# Altium PCB PCB_ALU.PcbDoc (part 1 of 2)
Units mil, origin at the board's own origin, x right, y up, seen from the top; angles counter-clockwise.
Board outline 7085 x 7085 mil, 4 copper layers (Top Layer, VCC, GND, Bottom Layer), stack 23.756 mil thick; 181 components, 134 nets, 644 pads, 294 vias.
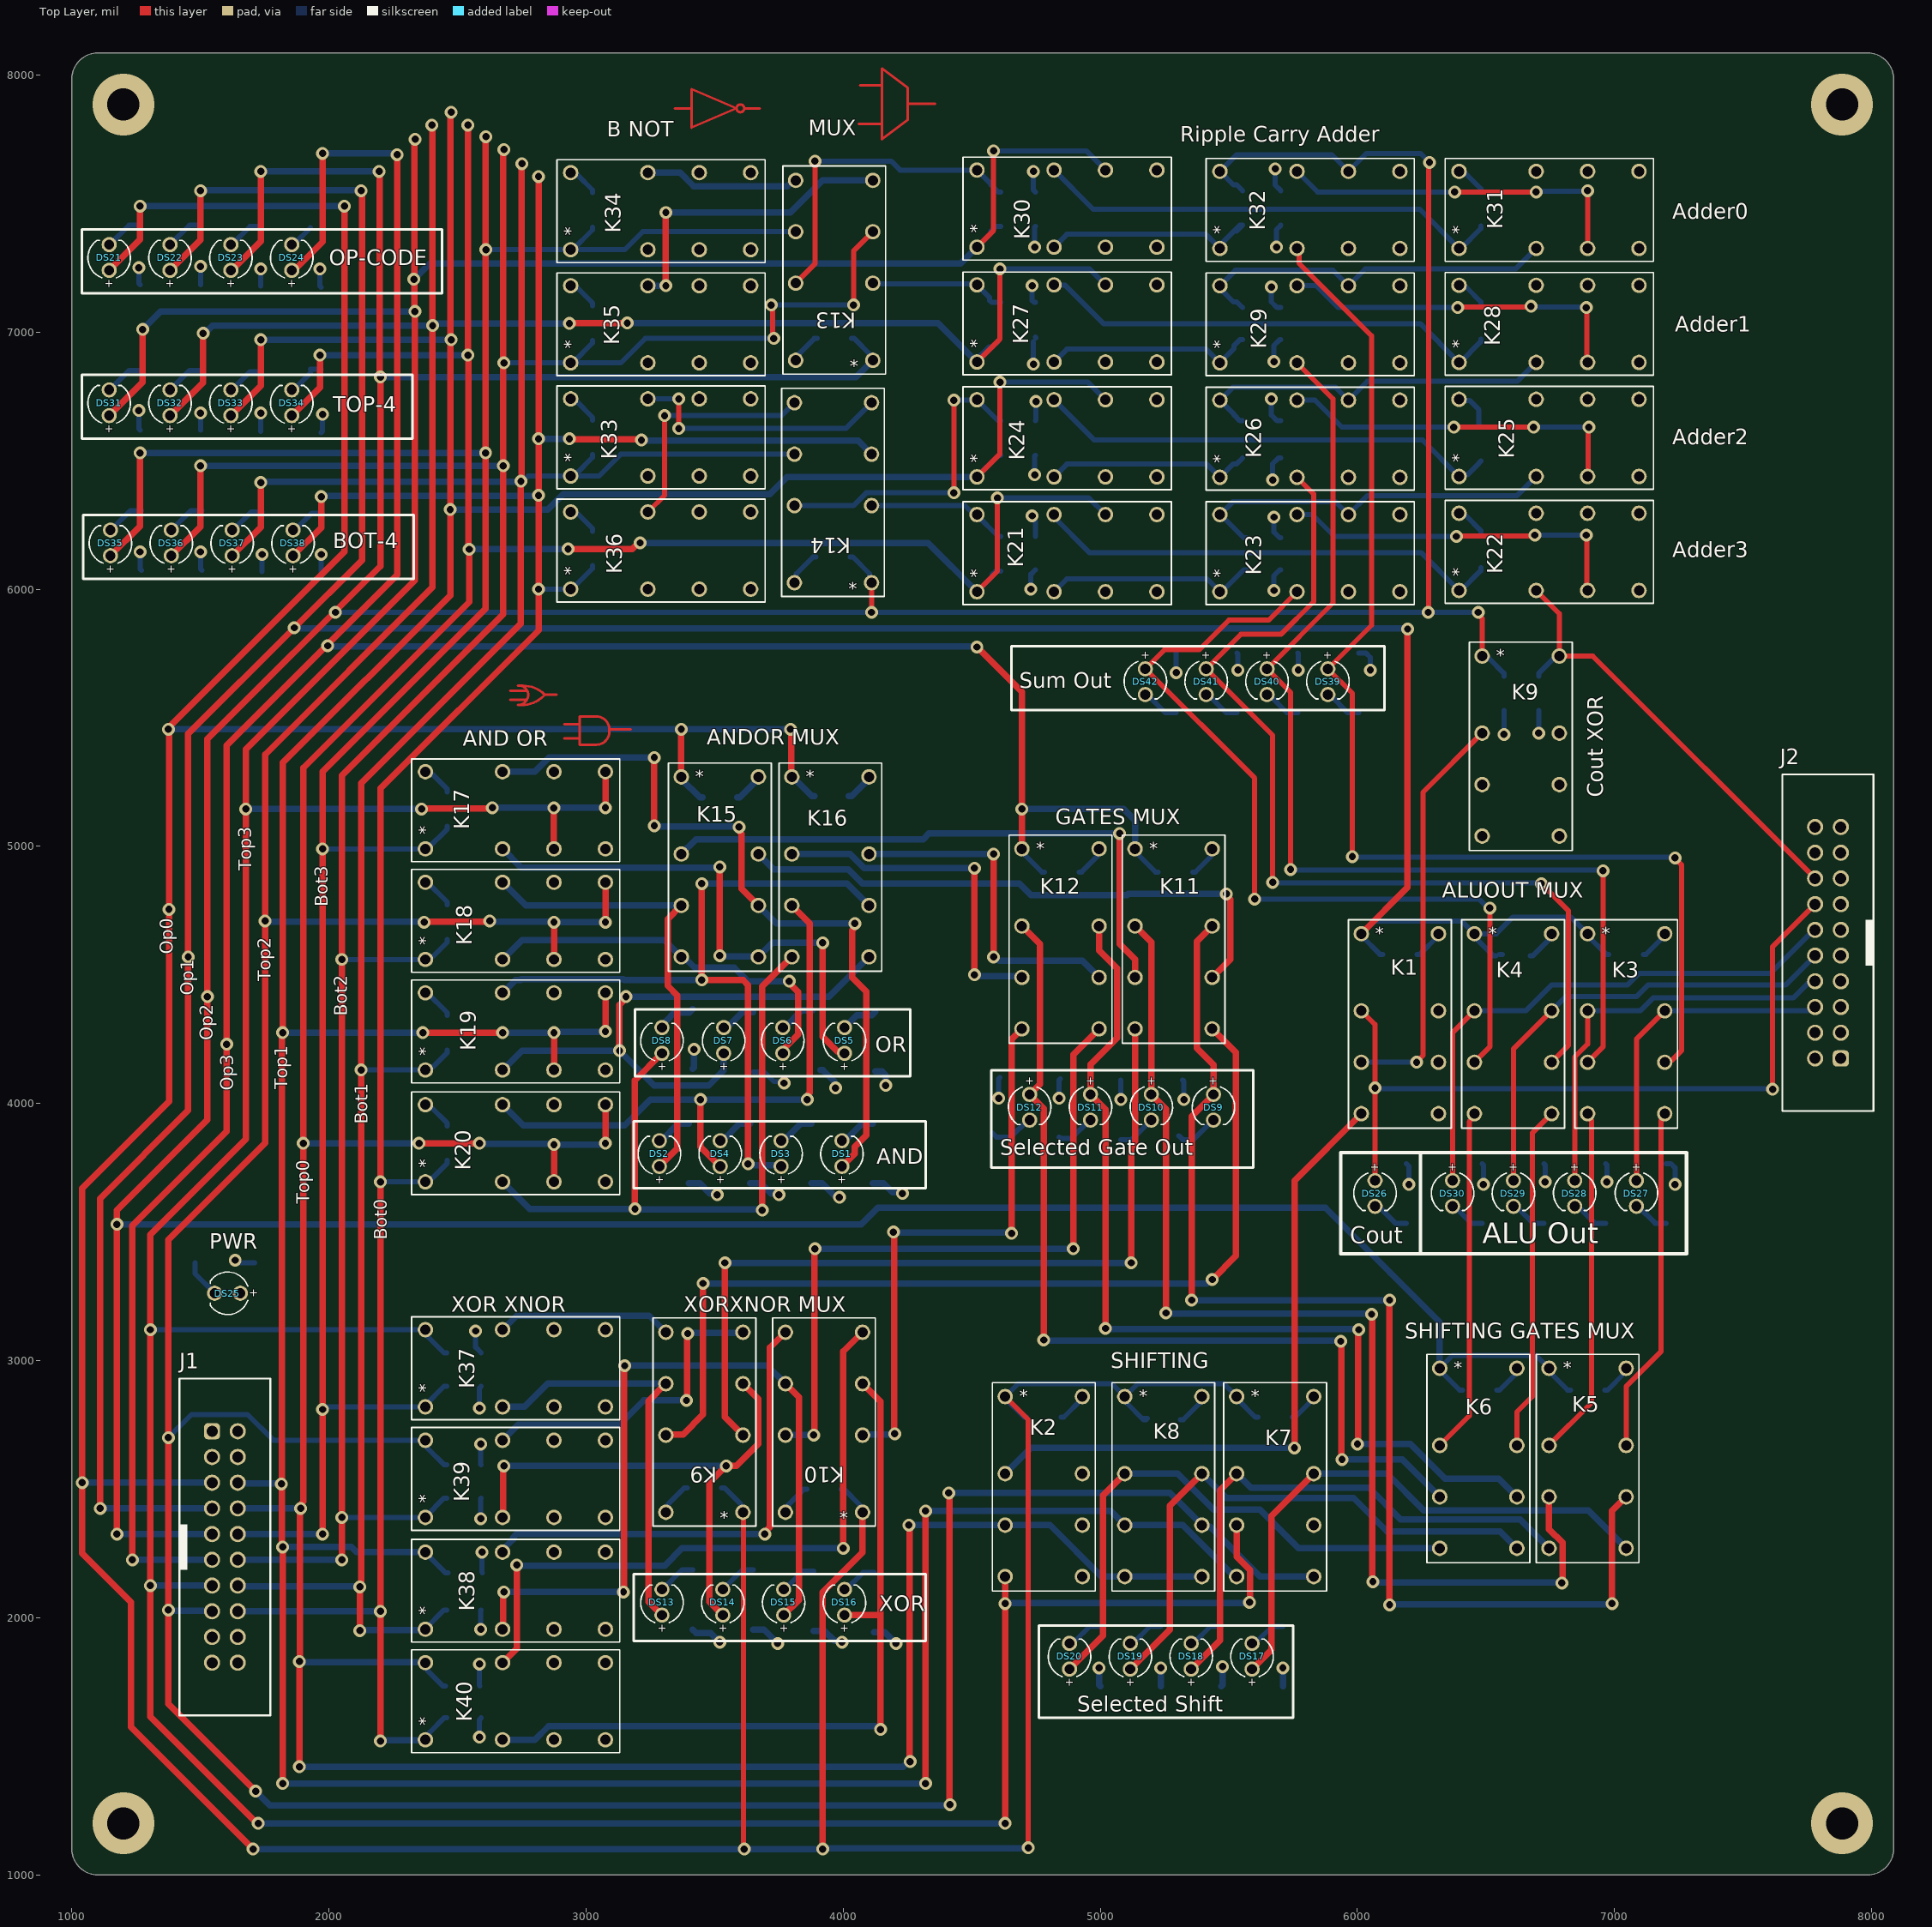
[diagram p0: Top Layer view]
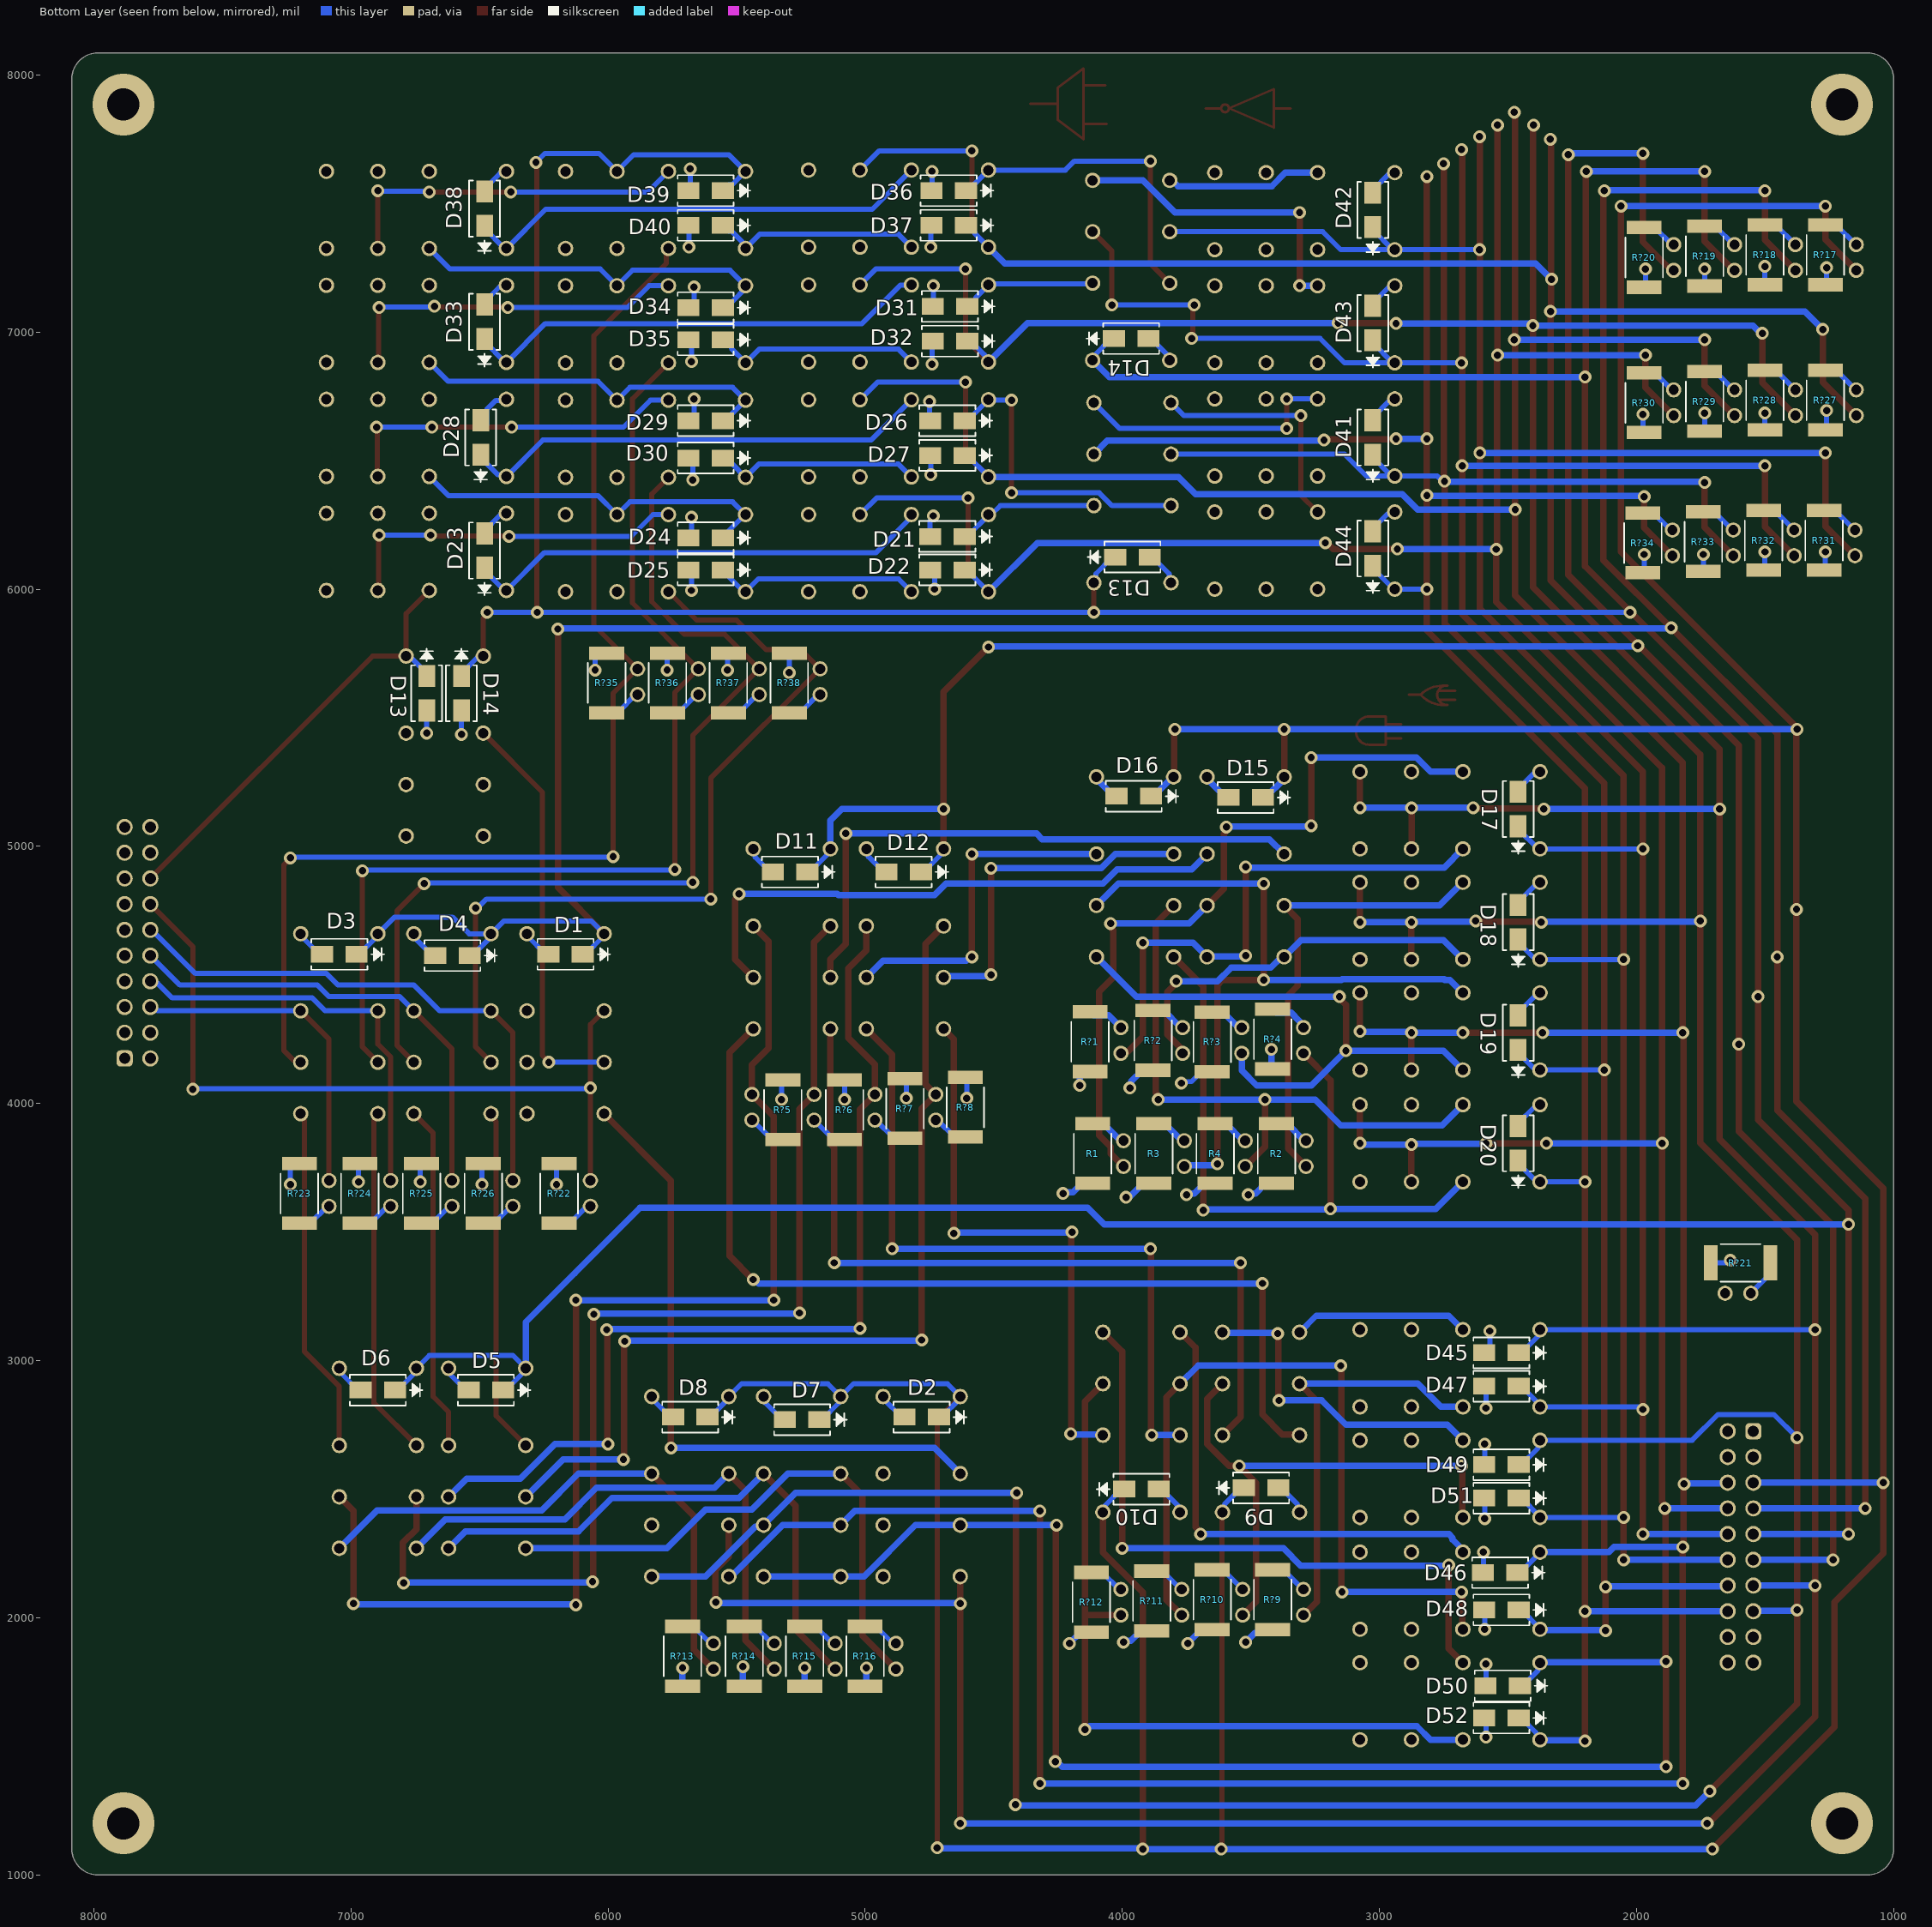
[diagram p1: Bottom Layer view, seen from below]
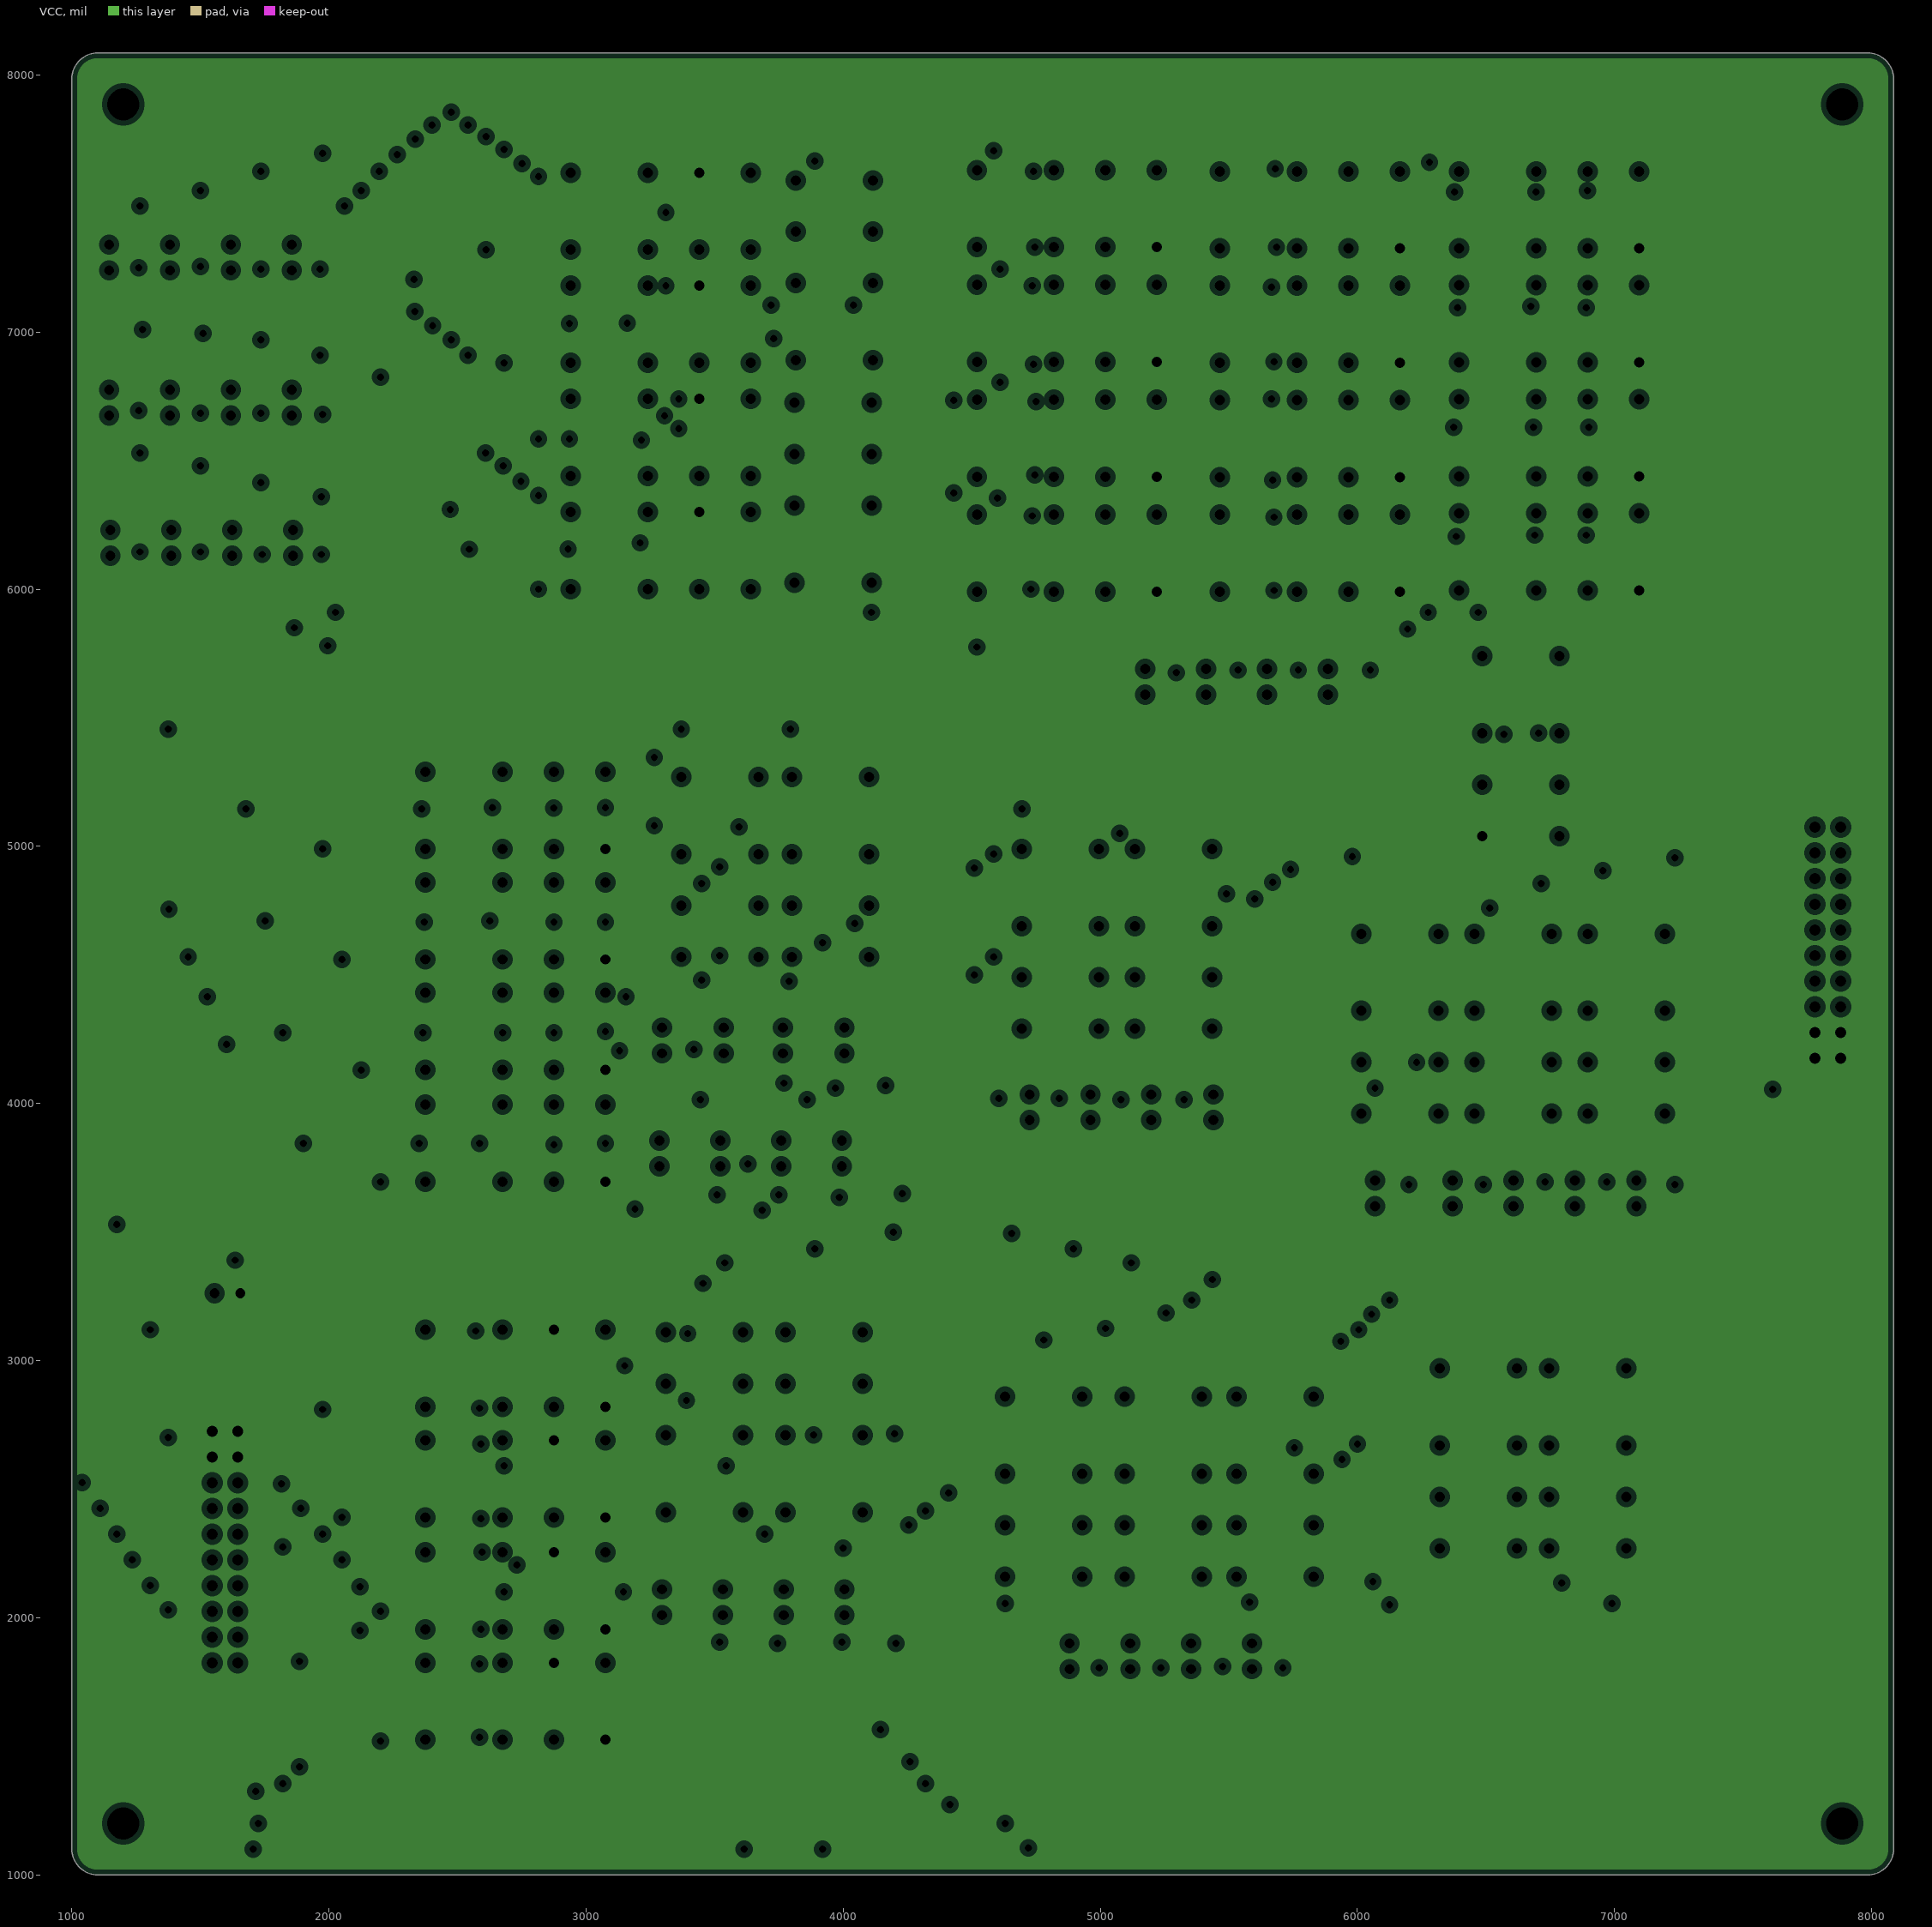
[diagram p2: VCC, clearances drawn from the general rule]
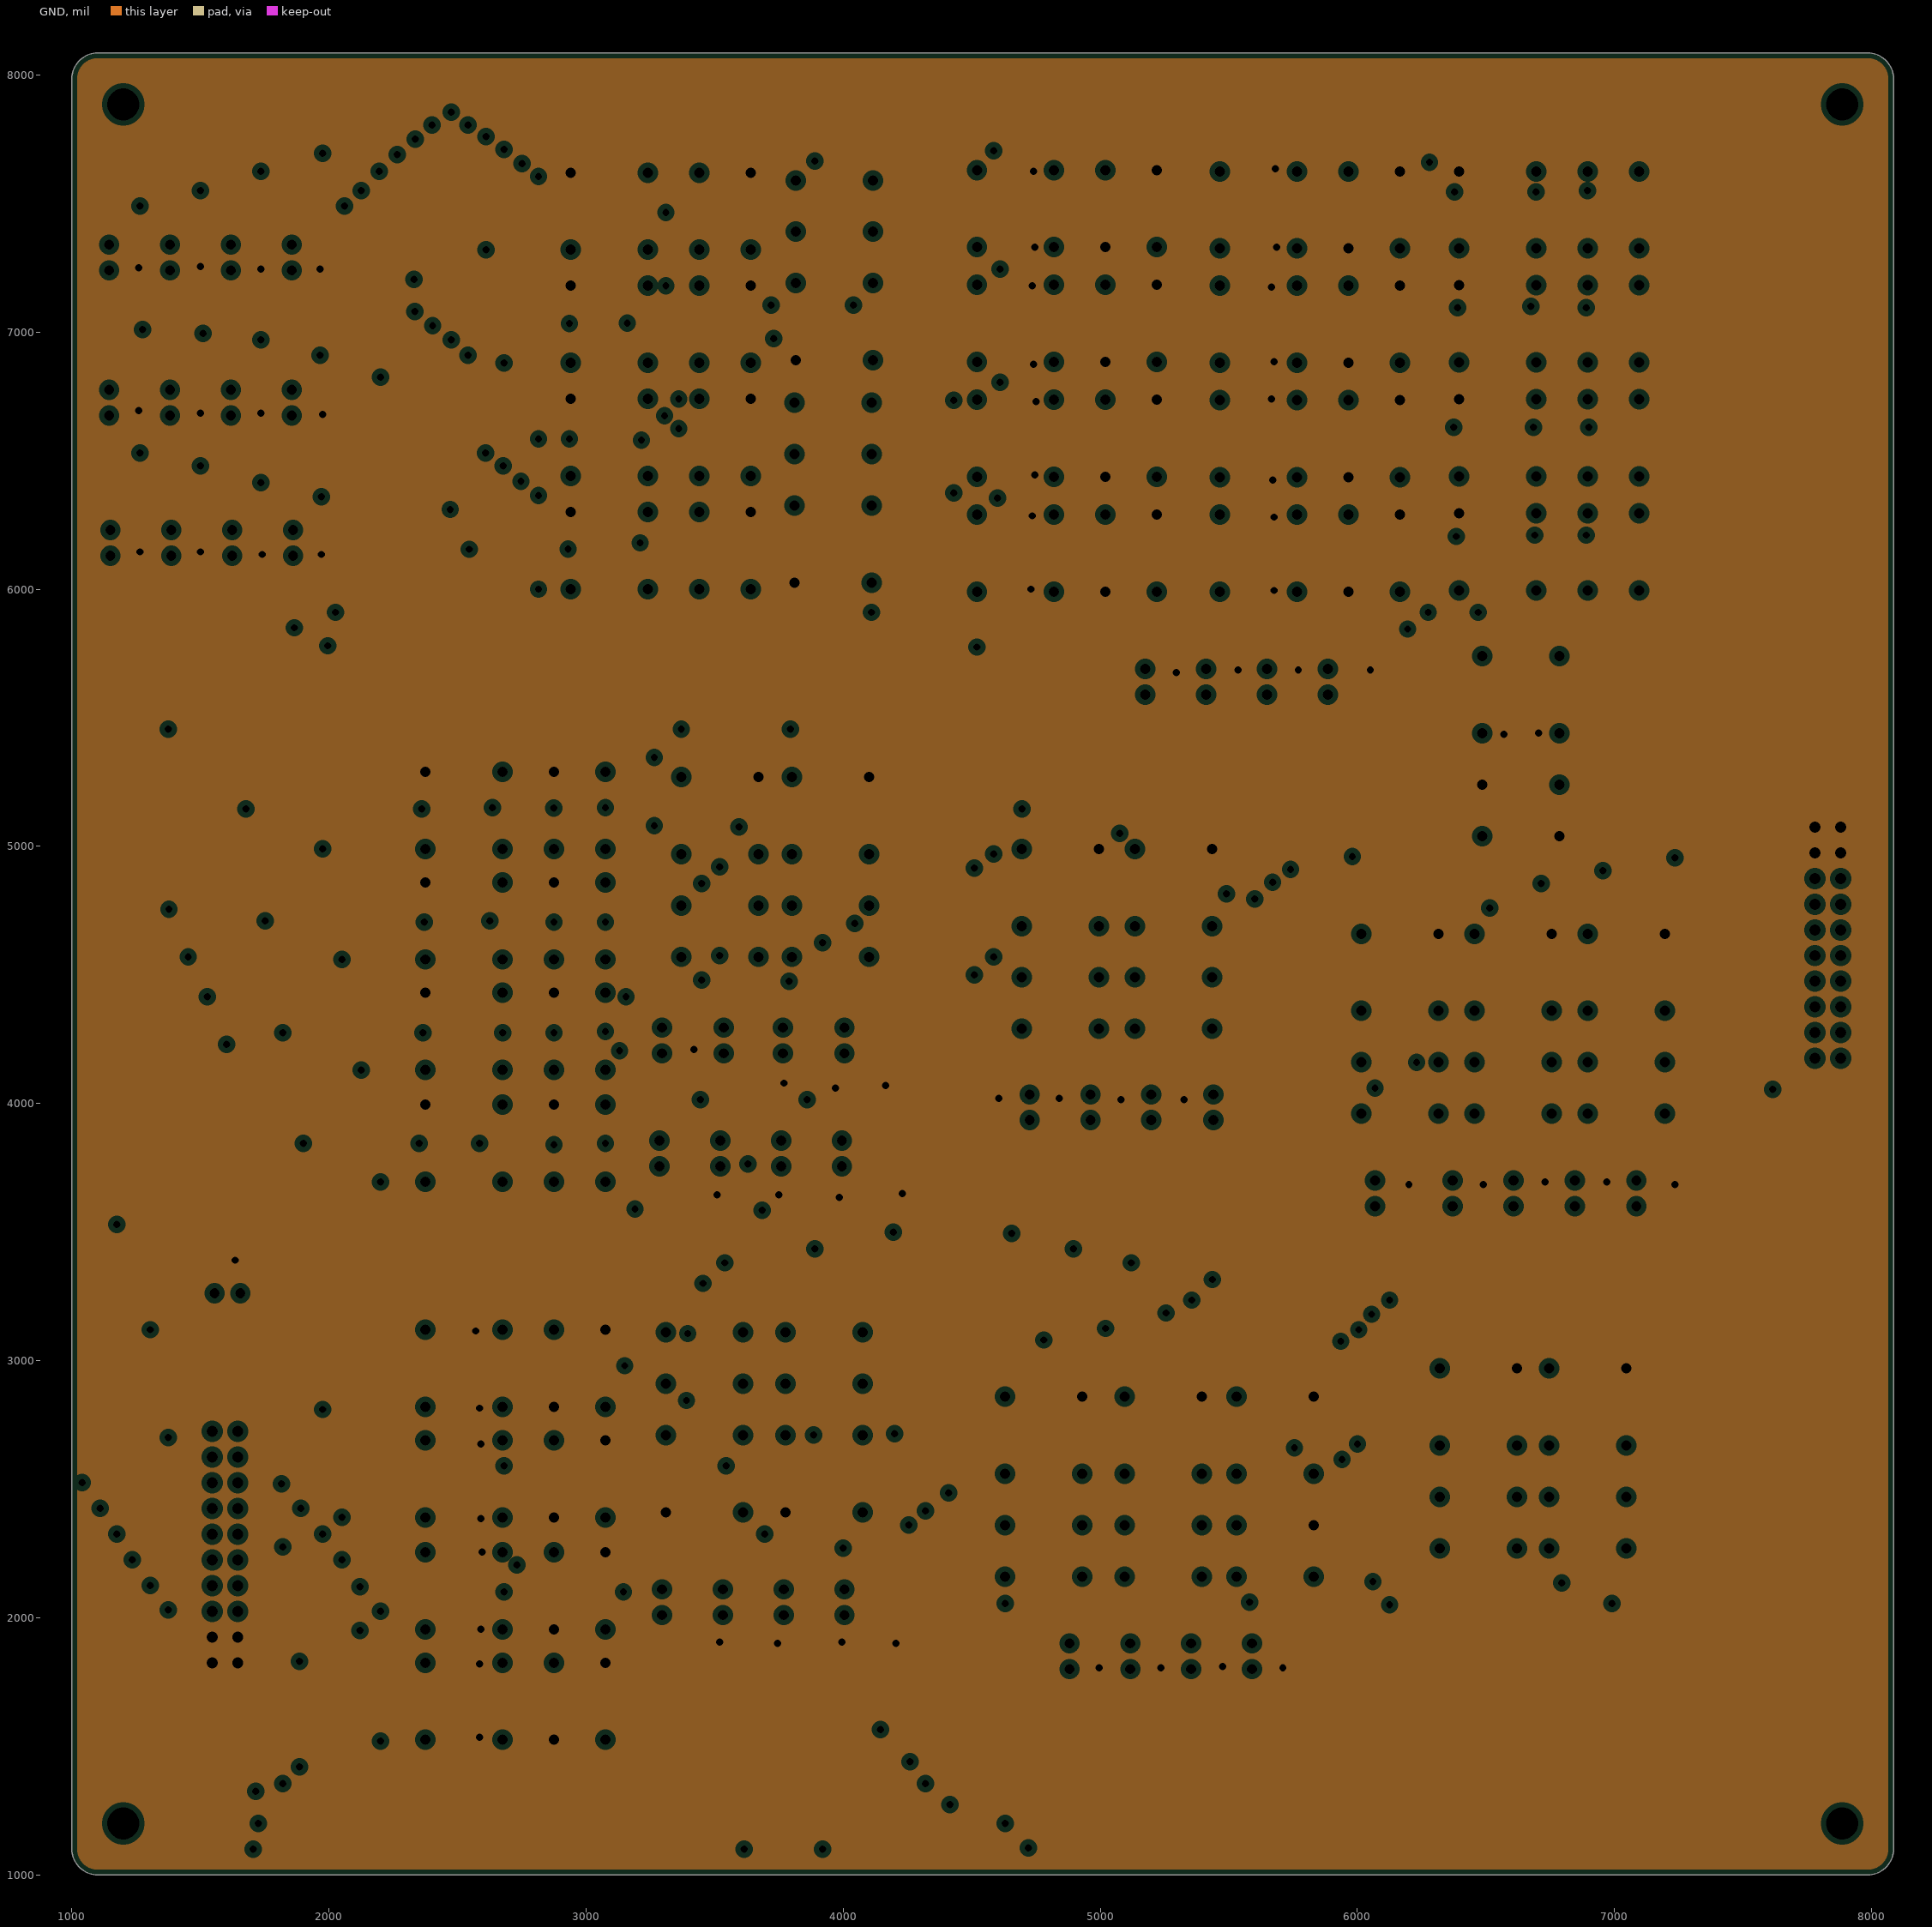
[diagram p3: GND, clearances drawn from the general rule]
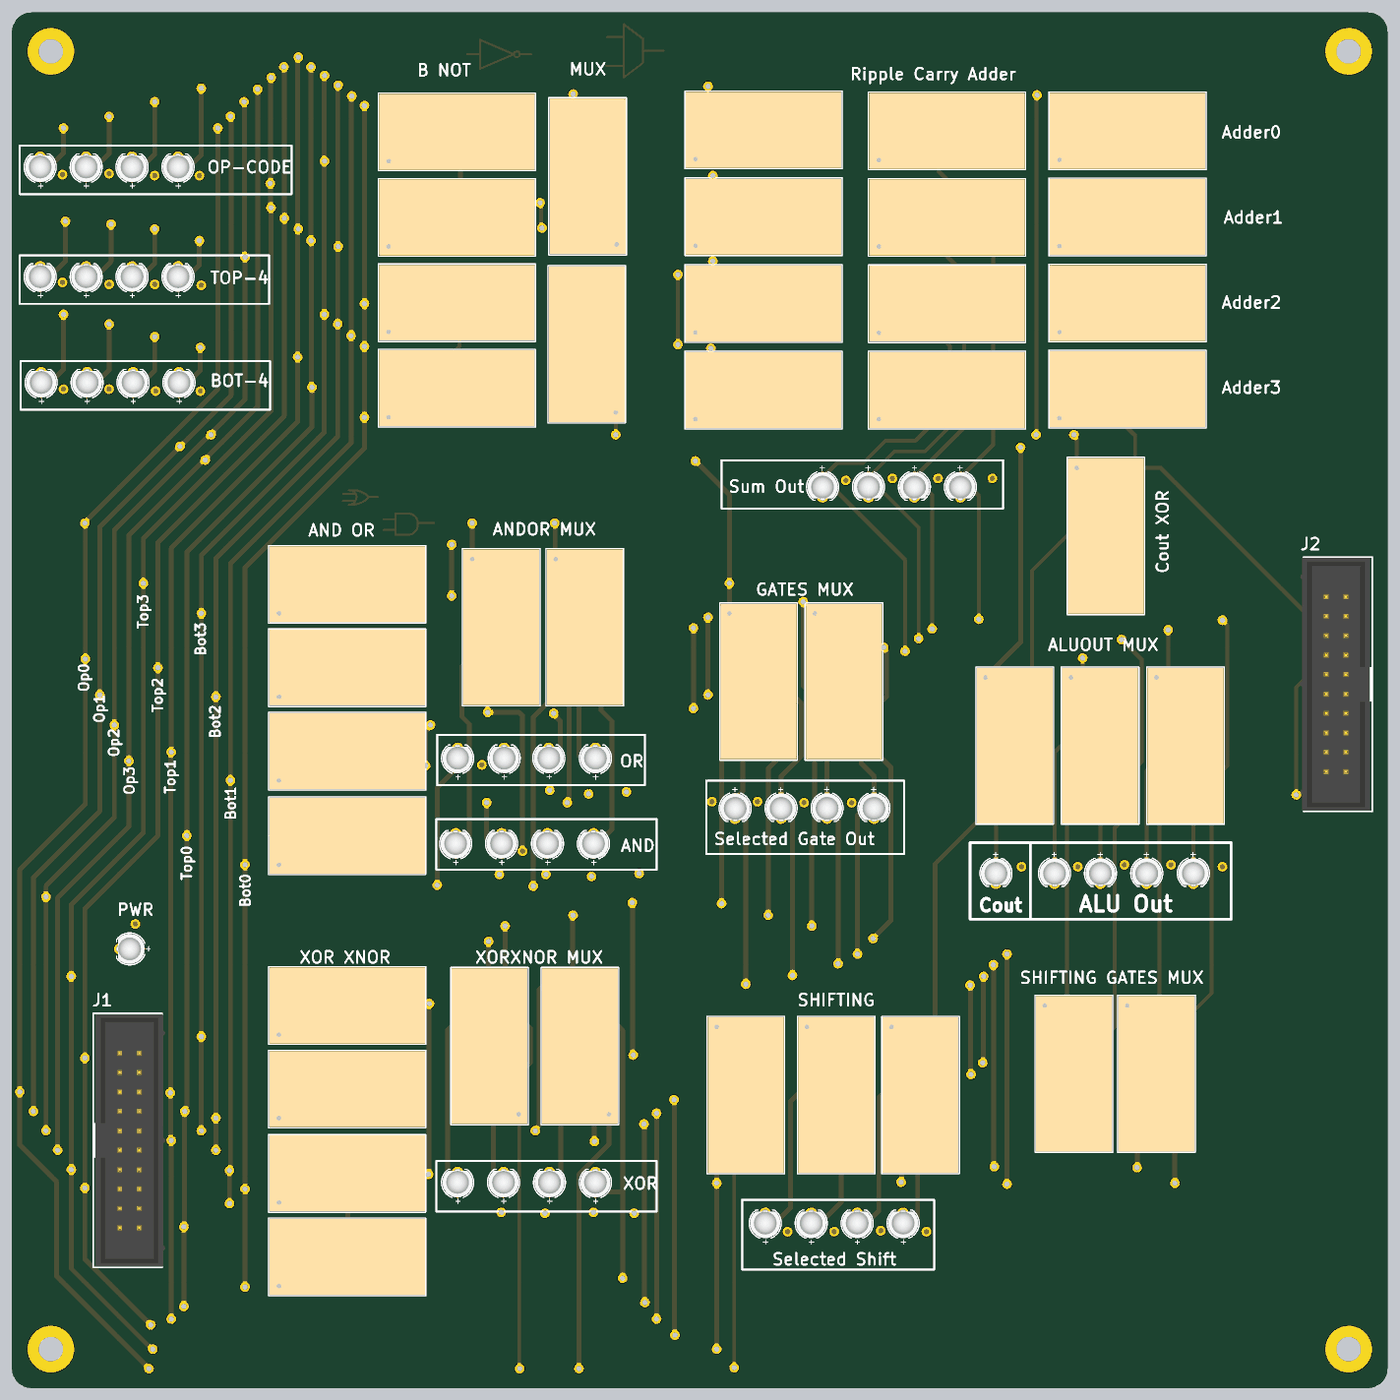
[diagram p5: 3D render of the assembled board from above, using the file's embedded part models]
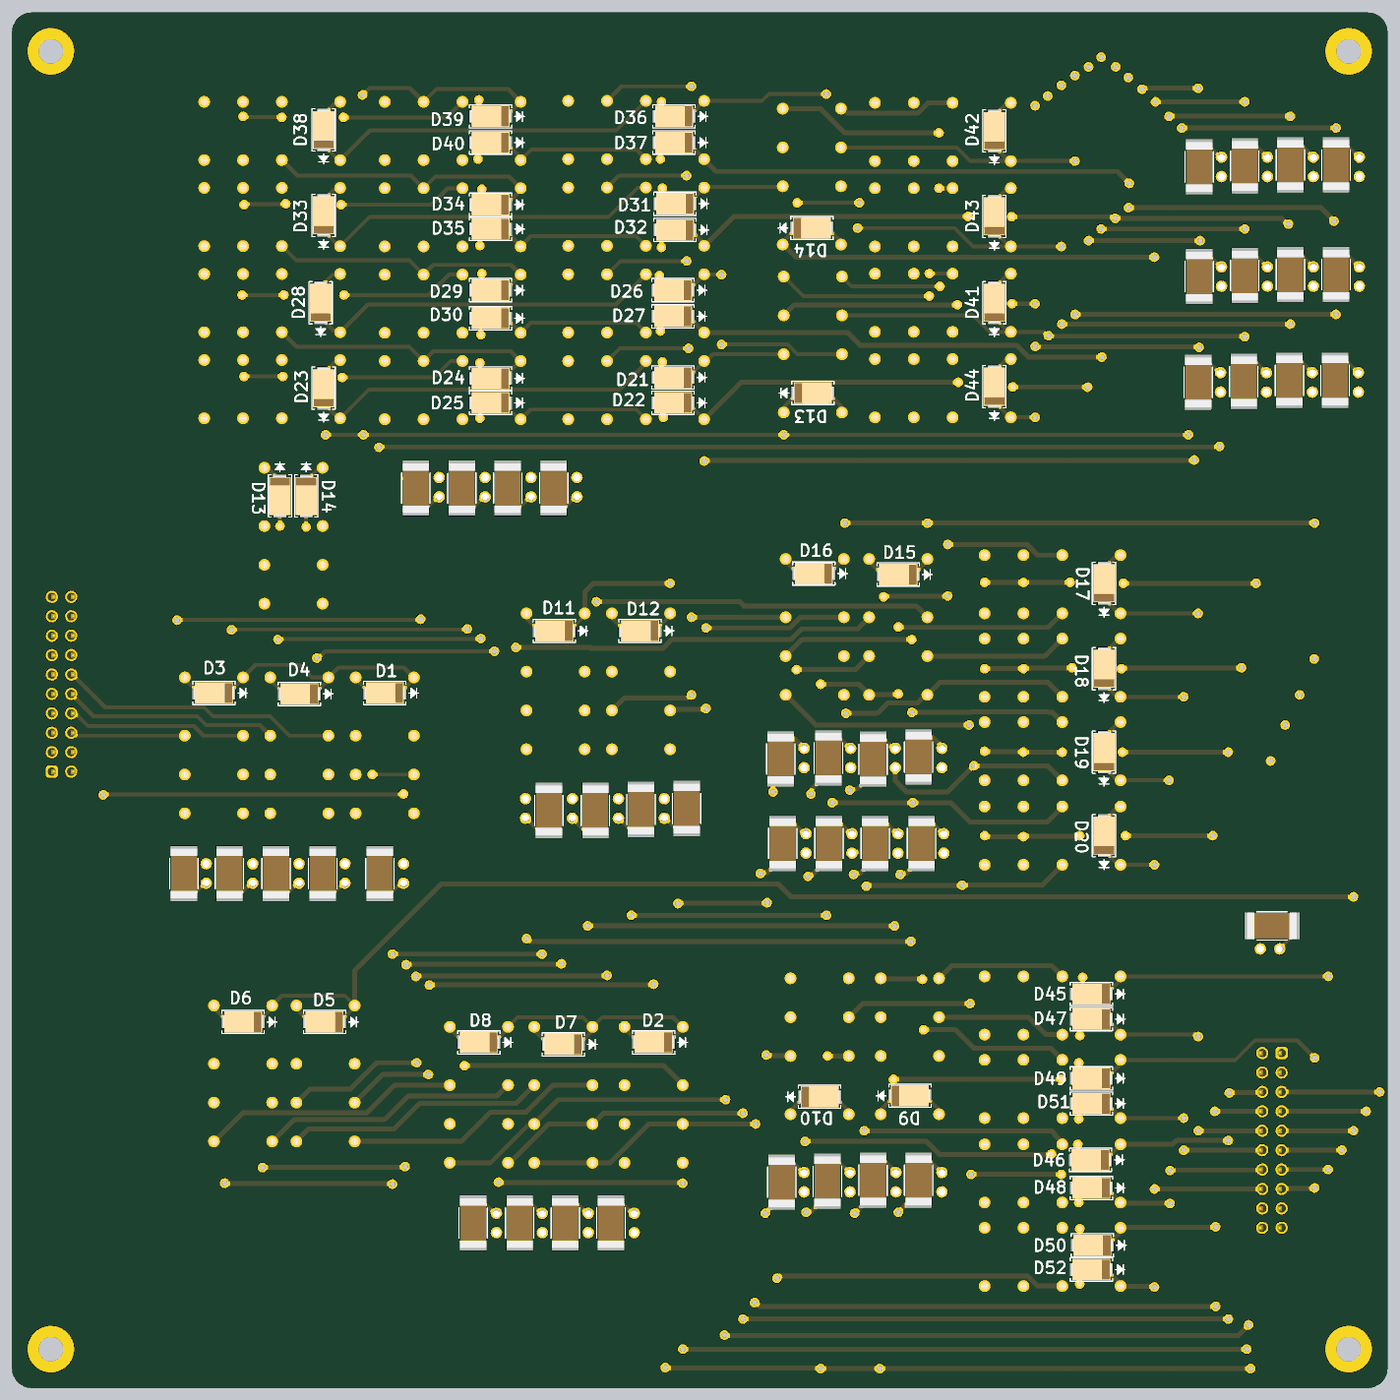
[diagram p6: 3D render of the assembled board from below, using the file's embedded part models]

## Layer stack, top to bottom
Top Solder: solder mask 0.4, Solder Resist, Dk 3.5
Top Layer: signal copper 1.4
Dielectric 2: prepreg 2.8, PP-006, Dk 4.1
VCC: plane copper 1.378, net +24V
Dielectric 1: dielectric 12.6, FR-4, Dk 4.8
GND: plane copper 1.378, net GND
Dielectric 3: prepreg 2.8, PP-006, Dk 4.1
Bottom Layer: signal copper 1.4
Bottom Solder: solder mask 0.4, Solder Resist, Dk 3.5

## Board outline
8085,1100 cw(c7985,1100) 7985,1000 1100,1000 cw(c1100,1100) 1000,1100 1000,7985 cw(c1100,7985) 1100,8085 7575,8085 7985,8085 cw(c7985,7985) 8085,7985

## Design rules (kind name [scope] priority, off if disabled: settings)
Clearance [All] p1: gap=10 ignorepadtopadclearanceinfootprint=FALSE
HoleSize [All] p1: absolutevalues=TRUE maxlimit=150 minlimit=1 maxpercent=80.000 minpercent=20.000
MinimumSolderMaskSliver [All] p1: minsoldermaskwidth=5
PlaneClearance [All] p1: clearance=20
PlaneConnect [All] p1: planeconnectstyle=Direct reliefexpansion=20 reliefentries=4 reliefconductorwidth=10 reliefairgap=10
PolygonConnect [All] p1: connectstyle=Relief reliefconductorwidth=10 reliefentries=4 polygonreliefangle="90 Angle" airgapwidth=10
RoutingVias [All] p1: holewidth=28 width=50 viastyle="Through Hole" minholewidth=28 minwidth=50 maxholewidth=28 maxwidth=50
SilkToSolderMaskClearance [IsPad] p1: minsilkscreentomaskgap=4 clearancetoexposedcopper=TRUE
SolderMaskExpansion [All] p1: expansion=4 istentingtop=FALSE
SupplyNets "Schematic Supply Nets_2" [InNet('GND')] p1: voltage=0.000
SupplyNets "Schematic Supply Nets_1" [InNet('+24V')] p2: voltage=0.000
Width [All] p1: maxlimit=50 minlimit=5 preferedwidth=20
25 further rules are at their usual default settings.

## Classes and differential pairs
component class U_XORXNOR1: D13 D14 K9
channel class FullAdder: U_FullAdder1 U_FullAdder2 U_FullAdder3 U_FullAdder4
channel class 4bitMux2: U_4bitMux21 U_4bitMux22 U_4bitMux23 U_4bitMux24 U_4bitMux25 U_4bitMux26 U_4bitMux27
channel class 1bitMux2: U_1bitMux21 U_1bitMux22
component class U_XORXNOR: D45 D46 D47 D48 D49 D50 D51 D52 K37 K38 K39 K40
component class U_NOT4: D41 D42 D43 D44 K33 K34 K35 K36
component class U_FullAdder4: D36 D37 D38 D39 D40 K30 K31 K32
component class U_FullAdder3: D31 D32 D33 D34 D35 K27 K28 K29
component class U_FullAdder2: D26 D27 D28 D29 D30 K24 K25 K26
component class U_FullAdder1: D21 D22 D23 D24 D25 K21 K22 K23
component class U_ANDOR4: D17 D18 D19 D20 K17 K18 K19 K20
component class U_4bitMux27: D15 D16 K15 K16
component class U_4bitMux26: D13 D14 K13 K14
component class U_4bitMux25: D11 D12 K11 K12
component class U_4bitMux24: D9 D10 K9 K10
component class U_4bitMux23: D7 D8 K7 K8
component class U_4bitMux22: D5 D6 K5 K6
component class U_4bitMux21: D3 D4 K3 K4
component class U_1bitMux22: D2 K2
component class U_1bitMux21: D1 K1
component class ALU: DS1 DS2 DS3 DS4 DS5 DS6 DS7 DS8 DS9 DS10 DS11 DS12 DS13 DS14 DS15 DS16 DS17 DS18 DS19 DS20 DS21 DS22 DS23 DS24 DS25 DS26 DS27 DS28 DS29 DS30 DS31 DS32 DS33 DS34 DS35 DS36 DS37 DS38 DS39 DS40 DS41 DS42 J1 J2 R1 R2 R3 R4 R? R?1 R?2 R?3 R?4 R?5 R?6 R?7 R?8 R?9 R?10 R?11 R?12 R?13 R?14 R?15 R?16 R?17 R?18 R?19 R?20 R?21 R?22 R?23 R?24 R?25 R?26 R?27 R?28 R?29 R?30 R?31 R?32 R?33 R?34 R?35 R?36 R?37 R?38

## Components (designator, comment, footprint, x,y, rotation, side; value= is the part's Value field where it differs from the comment)
D1 "SMAJ24A" "DI SMAJ24A" 6165,4580 r0 bottom value=650pF (schematic designator D)
D2 "SMAJ24A" "DI SMAJ24A" 4780,2780 r0 bottom value=650pF (schematic designator D)
D3 "SMAJ24A" "DI SMAJ24A" 7045,4580 r0 bottom value=650pF (schematic designator D)
D4 "SMAJ24A" "DI SMAJ24A" 6605,4575 r0 bottom value=650pF (schematic designator D)
D5 "SMAJ24A" "DI SMAJ24A" 6475,2885 r0 bottom value=650pF (schematic designator D)
D6 "SMAJ24A" "DI SMAJ24A" 6895,2885 r0 bottom value=650pF (schematic designator D)
D7 "SMAJ24A" "DI SMAJ24A" 5245,2770 r0 bottom value=650pF (schematic designator D)
D8 "SMAJ24A" "DI SMAJ24A" 5680,2780 r0 bottom value=650pF (schematic designator D)
D9 "SMAJ24A" "DI SMAJ24A" 3460,2505 r180 bottom value=650pF (schematic designator D)
D10 "SMAJ24A" "DI SMAJ24A" 3925,2500 r180 bottom value=650pF (schematic designator D)
D11 "SMAJ24A" "DI SMAJ24A" 5292,4900 r0 bottom value=650pF (schematic designator D)
D12 "SMAJ24A" "DI SMAJ24A" 4850,4900 r0 bottom value=650pF (schematic designator D)
D13 "SMAJ24A" "DI SMAJ24A" 6705,5595 r270 bottom value=650pF
D13 "SMAJ24A" "DI SMAJ24A" 3960,6125 r180 bottom value=650pF (schematic designator D)
D14 "SMAJ24A" "DI SMAJ24A" 6570,5595 r270 bottom value=650pF
D14 "SMAJ24A" "DI SMAJ24A" 3965,6975 r180 bottom value=650pF (schematic designator D)
D15 "SMAJ24A" "DI SMAJ24A" 3520,5190 r0 bottom value=650pF (schematic designator D)
D16 "SMAJ24A" "DI SMAJ24A" 3955,5195 r0 bottom value=650pF (schematic designator D)
D17 "SMAJ24A" "DI SMAJ24A" 2460,5145 r90 bottom value=650pF (schematic designator D1)
D18 "SMAJ24A" "DI SMAJ24A" 2460,4705 r90 bottom value=650pF (schematic designator D2)
D19 "SMAJ24A" "DI SMAJ24A" 2460,4275 r90 bottom value=650pF (schematic designator D3)
D20 "SMAJ24A" "DI SMAJ24A" 2460,3845 r90 bottom value=650pF (schematic designator D4)
D21 "SMAJ24A" "DI SMAJ24A" 4680,6205 r0 bottom value=650pF (schematic designator D)
D22 "SMAJ24A" "DI SMAJ24A" 4680,6075 r0 bottom value=650pF (schematic designator D)
D23 "SMAJ24A" "DI SMAJ24A" 6480,6150 r90 bottom value=650pF (schematic designator D)
D24 "SMAJ24A" "DI SMAJ24A" 5620,6200 r0 bottom value=650pF (schematic designator D)
D25 "SMAJ24A" "DI SMAJ24A" 5620,6075 r0 bottom value=650pF (schematic designator D)
D26 "SMAJ24A" "DI SMAJ24A" 4680,6655 r0 bottom value=650pF (schematic designator D)
D27 "SMAJ24A" "DI SMAJ24A" 4680,6520 r0 bottom value=650pF (schematic designator D)
D28 "SMAJ24A" "DI SMAJ24A" 6495,6590 r90 bottom value=650pF (schematic designator D)
D29 "SMAJ24A" "DI SMAJ24A" 5620,6655 r0 bottom value=650pF (schematic designator D)
D30 "SMAJ24A" "DI SMAJ24A" 5620,6510 r0 bottom value=650pF (schematic designator D)
D31 "SMAJ24A" "DI SMAJ24A" 4670,7100 r0 bottom value=650pF (schematic designator D)
D32 "SMAJ24A" "DI SMAJ24A" 4670,6965 r0 bottom value=650pF (schematic designator D)
D33 "SMAJ24A" "DI SMAJ24A" 6480,7040 r90 bottom value=650pF (schematic designator D)
D34 "SMAJ24A" "DI SMAJ24A" 5620,7095 r0 bottom value=650pF (schematic designator D)
D35 "SMAJ24A" "DI SMAJ24A" 5620,6970 r0 bottom value=650pF (schematic designator D)
D36 "SMAJ24A" "DI SMAJ24A" 4675,7550 r0 bottom value=650pF (schematic designator D)
D37 "SMAJ24A" "DI SMAJ24A" 4675,7415 r0 bottom value=650pF (schematic designator D)
D38 "SMAJ24A" "DI SMAJ24A" 6480,7480 r90 bottom value=650pF (schematic designator D)
D39 "SMAJ24A" "DI SMAJ24A" 5620,7550 r0 bottom value=650pF (schematic designator D)
D40 "SMAJ24A" "DI SMAJ24A" 5620,7415 r0 bottom value=650pF (schematic designator D)
D41 "SMAJ24A" "DI SMAJ24A" 3025,6590 r90 bottom value=650pF (schematic designator D)
D42 "SMAJ24A" "DI SMAJ24A" 3025,7475 r90 bottom value=650pF (schematic designator D)
D43 "SMAJ24A" "DI SMAJ24A" 3025,7035 r90 bottom value=650pF (schematic designator D)
D44 "SMAJ24A" "DI SMAJ24A" 3025,6158 r90 bottom value=650pF (schematic designator D)
D45 "SMAJ24A" "DI SMAJ24A" 2525,3030 r0 bottom value=650pF (schematic designator D5)
D46 "SMAJ24A" "DI SMAJ24A" 2530,2175 r0 bottom value=650pF (schematic designator D6)
D47 "SMAJ24A" "DI SMAJ24A" 2525,2900 r0 bottom value=650pF (schematic designator D7)
D48 "SMAJ24A" "DI SMAJ24A" 2525,2030 r0 bottom value=650pF (schematic designator D8)
D49 "SMAJ24A" "DI SMAJ24A" 2525,2595 r0 bottom value=650pF (schematic designator D9)
D50 "SMAJ24A" "DI SMAJ24A" 2520,1735 r0 bottom value=650pF (schematic designator D10)
D51 "SMAJ24A" "DI SMAJ24A" 2525,2465 r0 bottom value=650pF (schematic designator D11)
D52 "SMAJ24A" "DI SMAJ24A" 2525,1610 r0 bottom value=650pF (schematic designator D12)
DS1 "RED" "LED RED 151051RS11000" 3995,3805 r90 top
DS2 "RED" "LED RED 151051RS11000" 3285,3805 r90 top
DS3 "RED" "LED RED 151051RS11000" 3758.33,3805 r90 top
DS4 "RED" "LED RED 151051RS11000" 3521.67,3805 r90 top
DS5 "RED" "LED RED 151051RS11000" 4005,4245 r90 top
DS6 "RED" "LED RED 151051RS11000" 3765,4245 r90 top
DS7 "RED" "LED RED 151051RS11000" 3535,4245 r90 top
DS8 "RED" "LED RED 151051RS11000" 3295,4245 r90 top
DS9 "RED" "LED RED 151051RS11000" 5440,3985 r270 top
DS10 "RED" "LED RED 151051RS11000" 5198.33,3985 r270 top
DS11 "RED" "LED RED 151051RS11000" 4961.67,3985 r270 top
DS12 "RED" "LED RED 151051RS11000" 4725,3985 r270 top
DS13 "RED" "LED RED 151051RS11000" 3295,2060 r90 top
DS14 "RED" "LED RED 151051RS11000" 3531.67,2060 r90 top
DS15 "RED" "LED RED 151051RS11000" 3768.33,2060 r90 top
DS16 "RED" "LED RED 151051RS11000" 4005,2060 r90 top
DS17 "RED" "LED RED 151051RS11000" 5590,1850 r90 top
DS18 "RED" "LED RED 151051RS11000" 5353.33,1850 r90 top
DS19 "RED" "LED RED 151051RS11000" 5116.67,1850 r90 top
DS20 "RED" "LED RED 151051RS11000" 4880,1850 r90 top
DS21 "RED" "LED RED 151051RS11000" 1145,7290 r90 top
DS22 "RED" "LED RED 151051RS11000" 1381.67,7290 r90 top
DS23 "RED" "LED RED 151051RS11000" 1618.33,7290 r90 top
DS24 "RED" "LED RED 151051RS11000" 1855,7290 r90 top
DS25 "RED" "LED RED 151051RS11000" 1605,3261.67 r180 top
DS26 "RED" "LED RED 151051RS11000" 6068.33,3650 r270 top
DS27 "RED" "LED RED 151051RS11000" 7085,3650 r270 top
DS28 "RED" "LED RED 151051RS11000" 6845,3650 r270 top
DS29 "RED" "LED RED 151051RS11000" 6606.67,3650 r270 top
DS30 "RED" "LED RED 151051RS11000" 6370,3650 r270 top
DS31 "RED" "LED RED 151051RS11000" 1145,6725 r90 top
DS32 "RED" "LED RED 151051RS11000" 1381.67,6725 r90 top
DS33 "RED" "LED RED 151051RS11000" 1618.33,6725 r90 top
DS34 "RED" "LED RED 151051RS11000" 1855,6725 r90 top
DS35 "RED" "LED RED 151051RS11000" 1150,6180 r90 top
DS36 "RED" "LED RED 151051RS11000" 1386.67,6180 r90 top
DS37 "RED" "LED RED 151051RS11000" 1623.33,6180 r90 top
DS38 "RED" "LED RED 151051RS11000" 1860,6180 r90 top
DS39 "RED" "LED RED 151051RS11000" 5885,5640 r270 top
DS40 "RED" "LED RED 151051RS11000" 5648.33,5640 r270 top
DS41 "RED" "LED RED 151051RS11000" 5411.67,5640 r270 top
DS42 "RED" "LED RED 151051RS11000" 5175,5640 r270 top
J1 "Con 61202021621" "CON 61202021621" 1595,2275 r270 top
J2 "Con 61202021621" "CON 61202021621" 7830,4625 r90 top
K1 "J104D2C24VDC.15S" "RELAY J104D2C24VDC.15S" 6015,4660 r0 top (schematic designator K)
K2 "J104D2C24VDC.15S" "RELAY J104D2C24VDC.15S" 4630,2860 r0 top (schematic designator K)
K3 "J104D2C24VDC.15S" "Relay J104D2C24VDC.15S" 6895,4660 r0 top (schematic designator K)
K4 "J104D2C24VDC.15S" "Relay J104D2C24VDC.15S" 6455,4660 r0 top (schematic designator K)
K5 "J104D2C24VDC.15S" "Relay J104D2C24VDC.15S" 6745,2970 r0 top (schematic designator K)
K6 "J104D2C24VDC.15S" "Relay J104D2C24VDC.15S" 6320,2970 r0 top (schematic designator K)
K7 "J104D2C24VDC.15S" "RELAY J104D2C24VDC.15S" 5530,2860 r0 top (schematic designator K)
K8 "J104D2C24VDC.15S" "RELAY J104D2C24VDC.15S" 5095,2860 r0 top (schematic designator K)
K9 "J104D2C24VDC.15S" "Relay J104D2C24VDC.15S" 6485,5740 r0 top
K9 "J104D2C24VDC.15S" "RELAY J104D2C24VDC.15S" 3610,2410 r180 top (schematic designator K)
K10 "J104D2C24VDC.15S" "RELAY J104D2C24VDC.15S" 4075,2410 r180 top (schematic designator K)
K11 "J104D2C24VDC.15S" "RELAY J104D2C24VDC.15S" 5135,4990 r0 top (schematic designator K)
K12 "J104D2C24VDC.15S" "RELAY J104D2C24VDC.15S" 4695,4990 r0 top (schematic designator K)
K13 "J104D2C24VDC.15S" "RELAY J104D2C24VDC.15S" 4115,6890 r180 top (schematic designator K)
K14 "J104D2C24VDC.15S" "RELAY J104D2C24VDC.15S" 4110,6025 r180 top (schematic designator K)
K15 "J104D2C24VDC.15S" "RELAY J104D2C24VDC.15S" 3370,5270 r0 top (schematic designator K)
K16 "J104D2C24VDC.15S" "RELAY J104D2C24VDC.15S" 3800,5270 r0 top (schematic designator K)
K17 "J104D2C24VDC.15S" "RELAY J104D2C24VDC.15S" 2375,4990 r90 top (schematic designator K1)
K18 "J104D2C24VDC.15S" "RELAY J104D2C24VDC.15S" 2375,4560 r90 top (schematic designator K2)
K19 "J104D2C24VDC.15S" "RELAY J104D2C24VDC.15S" 2375,4130 r90 top (schematic designator K3)
K20 "J104D2C24VDC.15S" "RELAY J104D2C24VDC.15S" 2375,3695 r90 top (schematic designator K4)
K21 "J104D2C24VDC.15S" "RELAY J104D2C24VDC.15S" 4520,5990 r90 top (schematic designator K)
K22 "J104D2C24VDC.15S" "RELAY J104D2C24VDC.15S" 6395,5995 r90 top (schematic designator K)
K23 "J104D2C24VDC.15S" "RELAY J104D2C24VDC.15S" 5465,5990 r90 top (schematic designator K)
K24 "J104D2C24VDC.15S" "RELAY J104D2C24VDC.15S" 4520,6436.67 r90 top (schematic designator K)
K25 "J104D2C24VDC.15S" "RELAY J104D2C24VDC.15S" 6395,6438.33 r90 top (schematic designator K)
K26 "J104D2C24VDC.15S" "RELAY J104D2C24VDC.15S" 5465,6435 r90 top (schematic designator K)
K27 "J104D2C24VDC.15S" "RELAY J104D2C24VDC.15S" 4520,6883.33 r90 top (schematic designator K)
K28 "J104D2C24VDC.15S" "RELAY J104D2C24VDC.15S" 6395,6881.67 r90 top (schematic designator K)
K29 "J104D2C24VDC.15S" "RELAY J104D2C24VDC.15S" 5465,6880 r90 top (schematic designator K)
K30 "J104D2C24VDC.15S" "RELAY J104D2C24VDC.15S" 4520,7330 r90 top (schematic designator K)
K31 "J104D2C24VDC.15S" "RELAY J104D2C24VDC.15S" 6395,7325 r90 top (schematic designator K)
K32 "J104D2C24VDC.15S" "RELAY J104D2C24VDC.15S" 5465,7325 r90 top (schematic designator K)
K33 "J104D2C24VDC.15S" "RELAY J104D2C24VDC.15S" 2940,6440 r90 top (schematic designator K)
K34 "J104D2C24VDC.15S" "RELAY J104D2C24VDC.15S" 2940,7320 r90 top (schematic designator K)
K35 "J104D2C24VDC.15S" "RELAY J104D2C24VDC.15S" 2940,6880 r90 top (schematic designator K)
K36 "J104D2C24VDC.15S" "RELAY J104D2C24VDC.15S" 2940,6000 r90 top (schematic designator K)
K37 "J104D2C24VDC.15S" "RELAY J104D2C24VDC.15S" 2375,2820 r90 top (schematic designator K5)
K38 "J104D2C24VDC.15S" "RELAY J104D2C24VDC.15S" 2375,1955 r90 top (schematic designator K6)
K39 "J104D2C24VDC.15S" "RELAY J104D2C24VDC.15S" 2375,2390 r90 top (schematic designator K7)
K40 "J104D2C24VDC.15S" "RELAY J104D2C24VDC.15S" 2375,1525 r90 top (schematic designator K8)
R1 "1.3k" "RES 2512" 4115,3805 r270 bottom value=1.3kΩ
R2 "1.3k" "RES 2512" 3400,3805 r270 bottom value=1.3kΩ
R3 "1.3k" "RES 2512" 3876.67,3805 r270 bottom value=1.3kΩ
R4 "1.3k" "RES 2512" 3638.33,3805 r270 bottom value=1.3kΩ
R?1 "1.3k" "RES 2512" 4125,4240 r270 bottom value=1.3kΩ (schematic designator R?)
R?2 "1.3k" "RES 2512" 3880,4245 r270 bottom value=1.3kΩ (schematic designator R?)
R?3 "1.3k" "RES 2512" 3650,4239 r270 bottom value=1.3kΩ (schematic designator R?)
R?4 "1.3k" "RES 2512" 3415,4250 r270 bottom value=1.3kΩ (schematic designator R?)
R?5 "1.3k" "RES 2512" 5320,3975 r90 bottom value=1.3kΩ (schematic designator R?)
R?6 "1.3k" "RES 2512" 5080,3975 r90 bottom value=1.3kΩ (schematic designator R?)
R?7 "1.3k" "RES 2512" 4845,3980 r90 bottom value=1.3kΩ (schematic designator R?)
R?8 "1.3k" "RES 2512" 4610,3985 r90 bottom value=1.3kΩ (schematic designator R?)
R?9 "1.3k" "RES 2512" 3415,2070 r270 bottom value=1.3kΩ (schematic designator R?)
R?10 "1.3k" "RES 2512" 3650,2070 r270 bottom value=1.3kΩ (schematic designator R?)
R?11 "1.3k" "RES 2512" 3885,2065 r270 bottom value=1.3kΩ (schematic designator R?)
R?12 "1.3k" "RES 2512" 4120,2060 r270 bottom value=1.3kΩ (schematic designator R?)
R?13 "1.3k" "RES 2512" 5710,1850 r270 bottom value=1.3kΩ (schematic designator R?)
R?14 "1.3k" "RES 2512" 5470,1850 r270 bottom value=1.3kΩ (schematic designator R?)
R?15 "1.3k" "RES 2512" 5235,1850 r270 bottom value=1.3kΩ (schematic designator R?)
R?16 "1.3k" "RES 2512" 5000,1850 r270 bottom value=1.3kΩ (schematic designator R?)
R?17 "1.3k" "RES 2512" 1265,7300 r270 bottom value=1.3kΩ (schematic designator R?)
R?18 "1.3k" "RES 2512" 1500,7300 r270 bottom value=1.3kΩ (schematic designator R?)
R?19 "1.3k" "RES 2512" 1735,7295 r270 bottom value=1.3kΩ (schematic designator R?)
R?20 "1.3k" "RES 2512" 1970,7290 r270 bottom value=1.3kΩ (schematic designator R?)
R?21 "1.3k" "RES 2512" 1595,3380 r0 bottom value=1.3kΩ (schematic designator R?)
R?22 "1.3k" "RES 2512" 6190,3650 r90 bottom value=1.3kΩ (schematic designator R?)
R?23 "1.3k" "RES 2512" 7200,3650 r90 bottom value=1.3kΩ (schematic designator R?)
R?24 "1.3k" "RES 2512" 6965,3650 r90 bottom value=1.3kΩ (schematic designator R?)
R?25 "1.3k" "RES 2512" 6725,3650 r90 bottom value=1.3kΩ (schematic designator R?)
R?26 "1.3k" "RES 2512" 6485,3650 r90 bottom value=1.3kΩ (schematic designator R?)
R?27 "1.3k" "RES 2512" 1265,6735 r270 bottom value=1.3kΩ (schematic designator R?)
R?28 "1.3k" "RES 2512" 1500,6735 r270 bottom value=1.3kΩ (schematic designator R?)
R?29 "1.3k" "RES 2512" 1735,6730 r270 bottom value=1.3kΩ (schematic designator R?)
R?30 "1.3k" "RES 2512" 1970,6725 r270 bottom value=1.3kΩ (schematic designator R?)
R?31 "1.3k" "RES 2512" 1270,6190 r270 bottom value=1.3kΩ (schematic designator R?)
R?32 "1.3k" "RES 2512" 1505,6190 r270 bottom value=1.3kΩ (schematic designator R?)
R?33 "1.3k" "RES 2512" 1740,6185 r270 bottom value=1.3kΩ (schematic designator R?)
R?34 "1.3k" "RES 2512" 1975,6180 r270 bottom value=1.3kΩ (schematic designator R?)
R?35 "1.3k" "RES 2512" 6005,5635 r90 bottom value=1.3kΩ (schematic designator R?)
R?36 "1.3k" "RES 2512" 5768.33,5635 r90 bottom value=1.3kΩ (schematic designator R?)
R?37 "1.3k" "RES 2512" 5531.67,5635 r90 bottom value=1.3kΩ (schematic designator R?)
R?38 "1.3k" "RES 2512" 5295,5635 r90 bottom value=1.3kΩ (schematic designator R?)

## Footprints (in the part's own frame and the unit in brackets; to place one, negate y for a bottom-side part, rotate by r counter-clockwise, add the part's x,y. Pads: shape width x height; smd on the part's side, far side on the other; paste and mask are expansions set on the pad)
"CON 61202021621" [mm]
  rrect50% 1.6x1.6 hole 1.1: 1(-11.43,-1.27)
  round 1.6 hole 1.1: 2(-11.43,1.27) 3(-8.89,-1.27) 4(-8.89,1.27) 5(-6.35,-1.27) 6(-6.35,1.27) 7(-3.81,-1.27) 8(-3.81,1.27) 9(-1.27,-1.27) 10(-1.27,1.27) 11(1.27,-1.27) 12(1.27,1.27) 13(3.81,-1.27) 14(3.81,1.27) 15(6.35,-1.27) 16(6.35,1.27) 17(8.89,-1.27) 18(8.89,1.27) 19(11.43,-1.27) 20(11.43,1.27)
  silkscreen extent -16.63,-4.5 16.63,4.5, body extent -16.53,-4.17 16.53,5, height 9.13
"DI SMAJ24A" [mil]
  rect 86x65 smd paste+0 mask+4: 1(-67,0) 2(67,0)
  silkscreen extent -174,-60 109,60, body extent -104,-55 104,55, height 92
"LED RED 151051RS11000" [mm]
  round 1.5 hole 1: 1(-1.27,0) 2(1.27,0)
  silkscreen extent -2,-2.1 1.69,2.1, body extent -1.99,-1.96 1.63,1.96, height 5.35
"RELAY J104D2C24VDC.15S" [mil]
  round 60 hole 40 paste-99999 mask+0: 1(0,0) 2(0,-300) 3(0,-500) 4(0,-700) 5(300,-700) 6(300,-500) 7(300,-300) 8(300,0)
  silkscreen extent -50,-756 350,54, body extent -45,-751 345,49, height 450
"Relay J104D2C24VDC.15S" [mil]
  round 60 hole 40 paste-99999 mask+0: 1(0,0) 2(0,-300) 3(0,-500) 4(0,-700) 5(300,-700) 6(300,-500) 7(300,-300) 8(300,0)
  silkscreen extent -50,-756 350,54, body extent -45,-751 345,49, height 450
"RES 2512" [mil]
  rect 52x136 smd paste+0 mask+3: 1(-116,0) 2(116,0)
  silkscreen extent -78,-73 78,73, body extent -128,-68 128,68, height 28

## Part data
D1 D2 D3 D4 D5 D6 D7 D8 D9 D10 D11 D12 D13 D13 D14 D14 D15 D16 D17 D18 D19 D20 D21 D22 D23 D24 D25 D26 D27 D28 D29 D30 D31 D32 D33 D34 D35 D36 D37 D38 D39 D40 D41 D42 D43 D44 D45 D46 D47 D48 D49 D50 D51 D52: library part "DI SMAJ24A", "SMAJ Series 400 W 24 V Uni-Directional Surface Mount TVS Diode - DO-214AC", Breakdown Voltage=28.1V, Case/Package=SMA, Clamping Voltage=38.9V, Forward Voltage=3.5V, Leakage Current=1µA, Manufacturer=Littelfuse, Max Breakdown Voltage=29.5V, Max Junction Temperature (Tj)=150°C, Max Output current=10.3A, Max Power Dissipation=3.3W, Min Breakdown Voltage=26.7V, Min Operating Temperature=-65°C, Operating Supply Voltage=24V, Peak Pulse Power=400W, Power Line Protection=No, Supplier Part Number=SMAJ24ALFCT-ND, Test Current=1mA, Category="TVS Diodes", China RoHS=Non-Compliant, ComponentLink1Description=https://datasheet.octopart.com:443/SMAJ24A-Littelfuse-datasheet-150463581.pdf?src-supplier=Farnell, ComponentLink1URL=https://datasheet.octopart.com:443/SMAJ24A-Littelfuse-datasheet-150463581.pdf?src-supplier=Farnell, ComponentLink2Description=https://datasheet.octopart.com:443/SMAJ24A-Littelfuse-datasheet-63710798.pdf?src-supplier=element14+APAC, ComponentLink2URL=https://datasheet.octopart.com:443/SMAJ24A-Littelfuse-datasheet-63710798.pdf?src-supplier=element14+APAC, ComponentLink3Description=https://datasheet.octopart.com:443/SMAJ24A-Littelfuse-datasheet-11547152.pdf?src-supplier=element14+APAC, ComponentLink3URL=https://datasheet.octopart.com:443/SMAJ24A-Littelfuse-datasheet-11547152.pdf?src-supplier=element14+APAC, ComponentLink4Description=https://datasheet.octopart.com:443/SMAJ24A-Littelfuse-datasheet-5393952.pdf?src-supplier=element14+APAC, ComponentLink4URL=https://datasheet.octopart.com:443/SMAJ24A-Littelfuse-datasheet-5393952.pdf?src-supplier=element14+APAC, ComponentLink5Description=https://datasheet.octopart.com:443/SMAJ24A-Littelfuse-datasheet-511791.pdf?src-supplier=element14+APAC, ComponentLink5URL=https://datasheet.octopart.com:443/SMAJ24A-Littelfuse-datasheet-511791.pdf?src-supplier=element14+APAC, ComponentLink6Description=https://datasheet.octopart.com:443/SMAJ24A-Littelfuse-datasheet-164649624.pdf?src-supplier=JRH+Electronics, ComponentLink6URL=https://datasheet.octopart.com:443/SMAJ24A-Littelfuse-datasheet-164649624.pdf?src-supplier=JRH+Electronics, ComponentLink7Description=https://datasheet.octopart.com:443/SMAJ24A-Littelfuse-datasheet-38878911.pdf?src-supplier=RS+(Formerly+Allied+Electronics), ComponentLink7URL=https://datasheet.octopart.com:443/SMAJ24A-Littelfuse-datasheet-38878911.pdf?src-supplier=RS+(Formerly+Allied+Electronics), ComponentLink8Description=https://datasheet.octopart.com:443/SMAJ24A-Littelfuse-datasheet-17901671.pdf?src-supplier=Future+Electronics, ComponentLink8URL=https://datasheet.octopart.com:443/SMAJ24A-Littelfuse-datasheet-17901671.pdf?src-supplier=Future+Electronics, ComponentLink9Description=https://datasheet.octopart.com:443/SMAJ24A-Littelfuse-datasheet-1053.pdf?src-supplier=DigiKey, ComponentLink9URL=https://datasheet.octopart.com:443/SMAJ24A-Littelfuse-datasheet-1053.pdf?src-supplier=DigiKey, Composition=Zener, Direction=Unidirectional, Element Configuration=Single, Height=2.29mm, Lead Free="Lead Free", Length=4.5mm, Lifecycle Status=Production, Manufacturer Part Number=SMAJ24A, Max Operating Temperature=150°C, Max Reverse Leakage Current=1µA, Max Surge Current=10.3A, Mounting Technology="Surface Mount", Number of Channels=1, Number of Elements=1, Number of Terminals=2, Number of Unidirectional Channels=1, Packaging="Tape & Reel", Peak Pulse Current=10.3A, Peak Reverse Current=1µA, Pins=2, Polarity=Unidirectional, Power Dissipation=400W, Power Rating=400W, Pricing="1=0.21, 10=0.113, 100=0.074, 500=0.072, 1000=0.071 (USD)", Radiation Hardening=No, REACH SVHC=No, Reverse Breakdown Voltage=26.7V, Reverse Standoff Voltage=24V, Reverse Voltage=24V, RoHS=Compliant, Schedule B="8541100080, 8541100080|8541100080|8541100080|8541100080|8541100080", Stock=97583, Supplier=DigiKey, Termination=SMD/SMT, Voltage Rating (DC)=24V, Width=2.79mm
DS1 DS2 DS3 DS4 DS5 DS6 DS7 DS8 DS9 DS10 DS11 DS12 DS13 DS14 DS15 DS16 DS17 DS18 DS19 DS20 DS21 DS22 DS23 DS24 DS25 DS26 DS27 DS28 DS29 DS30 DS31 DS32 DS33 DS34 DS35 DS36 DS37 DS38 DS39 DS40 DS41 DS42: library part "LED RED 151051RS11000", "WL-TMRC Red Color Diffused 5 mm Round Through Hole LED", Case/Package=Radial, Color=Red, Forward Current=100mA, Forward Voltage=2.1V, Manufacturer="Wurth Elektronik", Manufacturer Part Number=151051RS11000, Max Operating Temperature=85°C, Max Reverse Voltage (DC)=5V, Min Operating Temperature=-40°C, Supplier Part Number=732-5016-ND, Test Current=20mA, Category=LEDs, ComponentLink1Description=https://datasheet.octopart.com:443/151051RS11000-Wurth-Elektronik-datasheet-168474692.pdf?src-supplier=Wurth+Elektronik, ComponentLink1URL=https://datasheet.octopart.com:443/151051RS11000-Wurth-Elektronik-datasheet-168474692.pdf?src-supplier=Wurth+Elektronik, ComponentLink2Description=https://datasheet.octopart.com:443/151051RS11000-W%C3%BCrth-Elektronik-datasheet-83005830.pdf?src-supplier=Future+Electronics, ComponentLink2URL=https://datasheet.octopart.com:443/151051RS11000-W%C3%BCrth-Elektronik-datasheet-83005830.pdf?src-supplier=Future+Electronics, ComponentLink3Description=https://datasheet.octopart.com:443/151051RS11000-W%C3%BCrth-Elektronik-datasheet-15983824.pdf?src-supplier=element14+APAC, ComponentLink3URL=https://datasheet.octopart.com:443/151051RS11000-W%C3%BCrth-Elektronik-datasheet-15983824.pdf?src-supplier=element14+APAC, Dominant Wavelength=645nm, Height=8.6mm, Length=5mm, Lens Size=5mm, Lens Style="Circular, Diffused, Round", Luminous Intensity=30mcd, Mounting Technology="Through Hole", Packaging=Bulk, Peak Wavelength=650nm, Pricing="1=0.15, 50=0.1396, 100=0.1197, 500=0.105 (USD)", REACH SVHC=Unknown, RoHS=Compliant, Stock=19120, Supplier=DigiKey, Viewing Angle=60°, Wavelength=630nm, Width=5mm
J1 J2: "WR-BHD Straight Male, Box Header, Through Hole, 2 Rows, 20 Contacts, 2.54mm Pitch", Color=Black, Contact Resistance=20mΩ, Current Rating=3A, Flammability Rating="UL94 V-0", Insulation Resistance=1GΩ, Manufacturer="Wurth Elektronik", Manufacturer Part Number=61202021621, Max Operating Temperature=105°C, Min Operating Temperature=-40°C, Operating Supply Voltage=250V, Supplier Part Number=732-2096-ND, Category="Headers and Wire Housings", ComponentLink1Description=https://datasheet.octopart.com:443/61202021621-W%C3%BCrth-Elektronik-datasheet-111087935.pdf?src-supplier=Upverter, ComponentLink1URL=https://datasheet.octopart.com:443/61202021621-W%C3%BCrth-Elektronik-datasheet-111087935.pdf?src-supplier=Upverter, ComponentLink2Description=https://datasheet.octopart.com:443/61202021621-Wurth-Elektronik-datasheet-168480024.pdf?src-supplier=Wurth+Elektronik, ComponentLink2URL=https://datasheet.octopart.com:443/61202021621-Wurth-Elektronik-datasheet-168480024.pdf?src-supplier=Wurth+Elektronik, ComponentLink3Description=https://datasheet.octopart.com:443/61202021621-W%C3%BCrth-Elektronik-datasheet-149523954.pdf?src-supplier=Farnell, ComponentLink3URL=https://datasheet.octopart.com:443/61202021621-W%C3%BCrth-Elektronik-datasheet-149523954.pdf?src-supplier=Farnell, ComponentLink4Description=https://datasheet.octopart.com:443/61202021621-W%C3%BCrth-Elektronik-Midcom-datasheet-10469446.pdf?src-supplier=Farnell, ComponentLink4URL=https://datasheet.octopart.com:443/61202021621-W%C3%BCrth-Elektronik-Midcom-datasheet-10469446.pdf?src-supplier=Farnell, ComponentLink5Description=https://datasheet.octopart.com:443/61202021621-W%C3%BCrth-Elektronik-Midcom-datasheet-5367532.pdf?src-supplier=element14+APAC, ComponentLink5URL=https://datasheet.octopart.com:443/61202021621-W%C3%BCrth-Elektronik-Midcom-datasheet-5367532.pdf?src-supplier=element14+APAC, Connector Type="Male Pin", Contact Gender=Male, Contact Material=Gold, Contact Plating=Gold, Gender=Male, Height=9.25mm, Housing Material=PBT, Insulation=Insulated, Insulation Material=PBT, Lead Pitch=2.54mm, Length=33.06mm, Mounting Technology="Through Hole", Number of Contacts=20, Number of Positions=20, Number of Rows=2, Orientation=Vertical, Pins=20, Pitch=2.54mm, Pricing="1=0.86, 10=0.839, 50=0.7732, 160=0.69213, 320=0.64375 (USD)", RoHS=Compliant, Row Spacing=2.54mm, Stock=12933, Supplier=DigiKey, Termination="Through Hole", Voltage Rating=250V, Voltage Rating (DC)=250V, Width=33.06mm
K1 K2 K3 K4 K5 K6 K7 K8 K9 K9 K10 K11 K12 K13 K14 K15 K16 K17 K18 K19 K20 K21 K22 K23 K24 K25 K26 K27 K28 K29 K30 K31 K32 K33 K34 K35 K36 K37 K38 K39 K40: library part "Relay J104D2C24VDC.15S", "Relay Ul Gen Purp DPDT 2C 24VDC", Coil Current=6mA, Coil Power=150mW, Coil Resistance=3.84kΩ, Coil Voltage (DC)=18V, Contact Current Rating=2A, Contact Resistance=50mΩ, Contact Voltage Rating (AC)=250V, Insulation Resistance=100MΩ, Manufacturer="CIT Relay & Switch", Max Operating Temperature=85°C, Max Voltage Rating (DC)=100V, Min Operating Temperature=-40°C, Supplier Part Number=2449-J104D2C24VDC.15S-ND, Category="Signal Relays", Contact Plating=Gold, Electrical Life=100kcycles, Height=11.42mm, Length=20.37mm, Manufacturer Part Number=J104D2C24VDC.15S, Max Current Rating=2A, Number of Terminals=8, Pricing="1=1.26, 20=1.082, 40=1.045, 60=1.02383, 100=0.998, 260=0.95115, 500=0.92036, 1000=0.88878, 5000=0.8195 (USD)", Release Time=4ms, Response Time=6ms, Stock=5620, Supplier=DigiKey, Throw Configuration=DPDT
R1 R2 R3 R4 R?1 R?2 R?3 R?4 R?5 R?6 R?7 R?8 R?9 R?10 R?11 R?12 R?13 R?14 R?15 R?16 R?17 R?18 R?19 R?20 R?21 R?22 R?23 R?24 R?25 R?26 R?27 R?28 R?29 R?30 R?31 R?32 R?33 R?34 R?35 R?36 R?37 R?38: library part "RES 1.3k 2512 1W", "Res Thick Film 2512 1.3K Ohm 1% 1W ±100ppm/C Pad SMD Automotive T/R RMCF2512FT1K30", Case/Package=2512, Manufacturer="Stackpole Electronics", Manufacturer Part Number=RMCF2512FT1K30, Max Operating Temperature=155°C, Max Power Dissipation=1W, Min Operating Temperature=-55°C, Supplier Part Number=RMCF2512FT1K30CT-ND, Temperature Coefficient=100ppm/°C, Tolerance=1%, Voltage Rating=500V, Working Voltage=200V, Category="Chip SMD Resistors", China RoHS=Non-Compliant, ComponentLink1Description=https://datasheet.octopart.com:443/RMCF2512FT1K30-Stackpole-Electronics-datasheet-182148065.pdf?src-supplier=IHS, ComponentLink1URL=https://datasheet.octopart.com:443/RMCF2512FT1K30-Stackpole-Electronics-datasheet-182148065.pdf?src-supplier=IHS, ComponentLink2Description=https://datasheet.octopart.com:443/RMCF2512FT1K30-Stackpole-Electronics-datasheet-28504820.pdf?src-supplier=Future+Electronics, ComponentLink2URL=https://datasheet.octopart.com:443/RMCF2512FT1K30-Stackpole-Electronics-datasheet-28504820.pdf?src-supplier=Future+Electronics, ComponentLink3Description=https://datasheet.octopart.com:443/RMCF2512FT1K30-Stackpole-Electronics-datasheet-141193804.pdf?src-supplier=Master+Electronics, ComponentLink3URL=https://datasheet.octopart.com:443/RMCF2512FT1K30-Stackpole-Electronics-datasheet-141193804.pdf?src-supplier=Master+Electronics, ComponentLink4Description=https://datasheet.octopart.com:443/RMCF2512FT1K30-Stackpole-Electronics-datasheet-189104163.pdf?src-supplier=Master+Electronics, ComponentLink4URL=https://datasheet.octopart.com:443/RMCF2512FT1K30-Stackpole-Electronics-datasheet-189104163.pdf?src-supplier=Master+Electronics, ComponentLink5Description=https://datasheet.octopart.com:443/RMCF2512FT1K30-Stackpole-Electronics-datasheet-116606903.pdf?src-supplier=Master+Electronics, ComponentLink5URL=https://datasheet.octopart.com:443/RMCF2512FT1K30-Stackpole-Electronics-datasheet-116606903.pdf?src-supplier=Master+Electronics, ComponentLink6Description=https://datasheet.octopart.com:443/RMCF2512FT1K30-Stackpole-Electronics-datasheet-62091608.pdf?src-supplier=Stackpole+Electronics, ComponentLink6URL=https://datasheet.octopart.com:443/RMCF2512FT1K30-Stackpole-Electronics-datasheet-62091608.pdf?src-supplier=Stackpole+Electronics, ComponentLink7Description=https://datasheet.octopart.com:443/RMCF2512FT1K30-Stackpole-Electronics-datasheet-12534581.pdf?src-supplier=Stackpole+Electronics, ComponentLink7URL=https://datasheet.octopart.com:443/RMCF2512FT1K30-Stackpole-Electronics-datasheet-12534581.pdf?src-supplier=Stackpole+Electronics, ComponentLink8Description=https://datasheet.octopart.com:443/RMCF2512FT1K30-Stackpole-Electronics-datasheet-10788263.pdf?src-supplier=Stackpole+Electronics, ComponentLink8URL=https://datasheet.octopart.com:443/RMCF2512FT1K30-Stackpole-Electronics-datasheet-10788263.pdf?src-supplier=Stackpole+Electronics, ComponentLink9Description=http://sigma.octopart.com:80/15940719/materials_sheet/Stackpole-Electronics-RMCF2512FT1K30.pdf?src-supplier=Compliance+Statements, ComponentLink9URL=http://sigma.octopart.com:80/15940719/materials_sheet/Stackpole-Electronics-RMCF2512FT1K30.pdf?src-supplier=Compliance+Statements, ComponentLink10Description=http://sigma.octopart.com:80/141158212/rohs_statement/Stackpole-Electronics-RMCF2512FT1K30.pdf?src-supplier=Compliance+Statements, ComponentLink10URL=http://sigma.octopart.com:80/141158212/rohs_statement/Stackpole-Electronics-RMCF2512FT1K30.pdf?src-supplier=Compliance+Statements, ComponentLink11Description=http://sigma.octopart.com:80/141158211/reach_statement/Stackpole-Electronics-RMCF2512FT1K30.pdf?src-supplier=Compliance+Statements, ComponentLink11URL=http://sigma.octopart.com:80/141158211/reach_statement/Stackpole-Electronics-RMCF2512FT1K30.pdf?src-supplier=Compliance+Statements, Composition="Thick Film", Contact Plating=Tin, Depth=3.2mm, Features="Automotive AEC-Q200", Height=550µm, Length=6.2992mm, Lifecycle Status=Production, Military Standard=Not, Mounting Technology="Surface Mount", Number of Terminals=2, Number of Terminations=2, Packaging="Tape & Reel (TR)", Power Dissipation=1W, Power Rating=1W, Pricing="1=0.24, 10=0.126, 25=0.1008, 50=0.0864, 100=0.0751, 250=0.0638, 500=0.05728, 1000=0.0521 (USD)", Radiation Hardening=No, REACH SVHC=Yes, RoHS=Compliant, Schedule B="8533210045, 8533210045|8533210045|8533210045|8533210045|8533210045", Stock=10417, Supplier=DigiKey, Width=3.2mm

## Via types
v1: diameter 50, hole 28, Top Layer to Bottom Layer, 290 vias
v2: diameter 240, hole 126, Top Layer to Bottom Layer, 4 vias

## Nets (pads, with @x,y where several pads share a name; then routed paths per layer and width w, separated by ;. In a path a pad name is that pad's centre, name@x,y a point inside that pad or via, vN(x,y) a via of type N, cw(c..) or ccw(c..) an arc to the next point about the centre after c; other vN are vias at no path point)
(AxB)Cin_U_FullAdder1: K22.3 K23.7 | length 1379.4
  Top Layer w20: v1(6385,6205) 6387.5,6207.5 6687.5,6207.5 v1(6690,6210) ; v1(6890,6210) 6892.5,6207.5 6892.5,5997.5 K22.3@6895,5995
  Bottom Layer w20: K23.7@5765,6290 5825,6290 5910,6205 v1(6385,6205) ; v1(6690,6210) v1(6890,6210)
(AxB)Cin_U_FullAdder2: K25.3 K26.7 | length 1372.2
  Top Layer w20: v1(6375,6630) v1(6685,6630) ; K25.3@6895,6438.33 6897.5,6440.83 6897.5,6627.5 v1(6900,6630)
  Bottom Layer w20: K26.7@5765,6735 5835,6735 5940,6630 v1(6375,6630) ; v1(6685,6630) v1(6900,6630)
(AxB)Cin_U_FullAdder3: K28.3 K29.7 | length 1379.8
  Top Layer w20: v1(6390,7095) 6392.5,7097.5 6672.5,7097.5 v1(6675,7100) ; v1(6890,7095) 6892.5,7092.5 6892.5,6884.17 K28.3@6895,6881.67
  Bottom Layer w20: K29.7@5765,7180 5840,7180 5925,7095 v1(6390,7095) ; v1(6675,7100) 6677.5,7097.5 6887.5,7097.5 v1(6890,7095)
(AxB)Cin_U_FullAdder4: K31.3 K32.7 | length 1390.2
  Top Layer w20: v1(6378.22,7545) v1(6695,7545) ; K31.3@6895,7325 v1(6895,7550)
  Bottom Layer w20: K32.7@5765,7625 5845,7545 v1(6378.22,7545) ; v1(6695,7545) 6697.5,7547.5 6892.5,7547.5 v1(6895,7550)
+24V: DS25.1 J1.1 J1.2 J1.3 J1.4 J2.1 J2.2 J2.3 J2.4 K9.4@6485,5040 K17.4 K18.4 K19.4 K20.4 K21.4 K22.4 K23.4 K24.4 K25.4 K26.4 K27.4 K28.4 K29.4 K30.4 K31.4 K32.4 K33.6 K34.6 K35.6 K36.6 K37.4 K37.6 K38.4 K38.6 K39.4 K39.6 K40.4 K40.6
A&B_U_FullAdder1: D23.1 K21.7 K22.1 | length 1830.7
  Bottom Layer w20: K21.7@4820,6290 4820,6280 4957.5,6142.5 6247.5,6142.5 K22.1@6395,5995 6402.5,5995 6480,6072.5 D23.1@6480,6083
A&B_U_FullAdder2: D28.1 K24.7 K25.1 | length 1808.8
  Bottom Layer w20: K24.7@4820,6736.67 4976.67,6580 6253.33,6580 K25.1@6395,6438.33 6402.65,6445.99 6428.85,6445.99 6472.5,6489.63 6472.5,6490.5 D28.1@6480,6498
A&B_U_FullAdder3: D33.1 K27.7 K28.1 | length 1828.9
  Bottom Layer w20: K27.7@4820,7183.33 4821.59,7181.74 4863.26,7181.74 5012.5,7032.5 6244.17,7032.5 K28.1@6395,6881.67 6399.17,6881.67 6480,6962.5 D33.1@6480,6973
A&B_U_FullAdder4: D38.1 K30.7 K31.1 | length 1828.9
  Bottom Layer w20: K30.7@4820,7630 4972.5,7477.5 6242.5,7477.5 K31.1@6395,7325 6402.5,7325 6480,7402.5 D38.1@6480,7413
A_U_FullAdder1: D22.1 D50.1 DS34.1 J1.8 K2.3 K8.4 K8.5 K20.3 K20.5 K21.1 K21.6 K40.8 | length 17429.9
  Top Layer w20: K21.1@4520,5990 4600,6070 v1(4600,6355)
  Top Layer w25: DS34.1@1855,6675 1965,6785 v1(1965,6910) ; v1(1885,1420) v1(1885,1830) 1887.5,1832.5 1887.5,2422.5 1894.78,2429.78 1894.78,2446.02 1900.91,2452.14 1900.91,5305.91 2545,5950 v1(2545,6155) 2542.5,6157.5 2542.5,6907.68 2540.18,6910 2540.18,7804.82 v1(2540,7805) ; v1(2350,3845) v1(2585,3845) ; K20.3@2875,3695 v1(2875,3840) ; v1(2930,6156.5) 3179.74,6156.5 3203.24,6180 v1(3210,6180) ; v1(3075,3845) K20.5@3075,3995 ; v1(4255,2360) 4257.5,2357.5 4257.5,1442.5 v1(4260,1440)
  Bottom Layer w20: K40.8@2375,1825 2382.65,1817.35 2382.65,1794.85 2442.5,1735 D50.1@2453,1735 ; K21.1@4520,5990 4580,6050 4580,6057.5 4592.5,6070 D22.1@4613,6070 ; v1(4600,6355) 4955,6355 K21.6@5020,6290
  Bottom Layer w25: J1.8@1645,2425 v1(1890,2425) ; v1(1885,1420) 4233.24,1420 4253.24,1440 v1(4260,1440) ; v1(1885,1830) 1887.5,1827.5 2372.5,1827.5 K40.8@2375,1825 ; v1(1900,3845) v1(2350,3845) ; v1(1965,6910) v1(2540,6910) ; v1(2545,6155) 2546.5,6156.5 v1(2930,6156.5) v1@2935,6156.5 ; v1(2585,3845) 2587.5,3842.5 v1@2872.5,3842.5 ; v1@2871.5,3843.5 v1@2872.5,3842.5 ; v1(3075,3845) 3070.22,3840.22 3053.45,3840.22 3053.24,3840 v1(2875,3840) v1@2872.5,3842.5 ; v1(3210,6180) 4330,6180 K21.1@4520,5990 ; v1(4255,2360) K2.3@4630,2360 4804.25,2360 5004.25,2160 K8.4@5095,2160 K8.5@5395,2160
A_U_FullAdder2: D27.1 D46.1 DS33.1 J1.6 K7.4 K8.3 K19.3 K19.5 K24.1 K24.6 K38.8 | length 18211.2
  Top Layer w20: K24.1@4520,6436.67 4610,6526.67 v1(4610,6805)
  Top Layer w25: DS33.1@1618.33,6675 1735,6791.67 v1(1735,6970) ; v1(1815,2520) 1817.5,2517.5 1817.5,2277.5 v1(1820,2275) v1(1820,1355) ; v1@1820,2526.14 1817.5,2528.64 1817.5,4272.5 v1(1820,4275) 1820,5325 2471.48,5976.48 v1(2471.48,6310) 2471.48,7851.48 v1(2475,7855) ; v1(2365,4275) v1(2675,4275) ; K19.3@2875,4130 v1(2875,4275) ; v1(3075,4280) K19.5@3075,4430 ; v1(4320,1355) v1(4320,2415)
  Bottom Layer w20: K38.8@2375,2255 2375,2252.5 2452.5,2175 D46.1@2463,2175 ; K24.1@4520,6436.67 4520,6437.5 4602.5,6520 D27.1@4613,6520 ; v1(4610,6805) 4951.67,6805 K24.6@5020,6736.67
  Bottom Layer w25: J1.6@1645,2525 1647.5,2522.5 1812.5,2522.5 v1(1815,2520) ; v1(1735,6970) v1(2475,6970) ; v1(1820,1355) v1(4320,1355) ; v1(1820,2275) 2087.29,2275 2107.29,2255 K38.8@2375,2255 ; v1(1820,4275) v1(2365,4275) ; v1(2471.48,6310) 2850,6310 2910,6370 3715,6370 3781.67,6436.67 K24.1@4520,6436.67 ; v1(2675,4275) v1(2875,4275) 2877.5,4277.5 3072.5,4277.5 v1(3075,4280) ; v1(4320,2415) 5040,2415 K8.3@5095,2360 5320.75,2360 5520.75,2160 K7.4@5530,2160
A_U_FullAdder3: D32.1 D49.1 DS32.1 J1.15 K7.5 K8.6 K18.3 K18.5 K27.1 K27.6 K39.8 | length 19977.6
  Top Layer w20: K27.1@4520,6883.33 4610,6973.33 v1(4610,7245)
  Top Layer w25: DS32.1@1381.67,6675 1510,6803.33 v1(1510,6995) ; v1(1715,1325) 1375,1665 v1(1375,2700) 1375,3470 1751.36,3846.36 v1(1751.36,4710) 1751.36,5356.36 2402.78,6007.78 v1(2402.78,7025) 2402.78,7802.22 v1(2400,7805) ; v1(2370,4705) 2372.5,4707.5 2622.5,4707.5 v1(2625,4710) ; K18.3@2875,4560 v1(2875,4705) ; v1(2935,7033.5) 2936.5,7035 v1(3160,7035) ; v1(3075,4705) K18.5@3075,4860 ; v1(4410,2485) 4412.5,2482.5 4412.5,1275 v1(4415,1272.5)
  Bottom Layer w20: v1(1375,2700) 1465,2790 1683.28,2790 1783.28,2690 K39.8@2375,2690 2382.65,2682.35 2382.65,2659.85 2447.5,2595 D49.1@2458,2595 ; K27.1@4520,6883.33 4520,6894.16 4536.59,6910.75 4536.59,6911.59 4567.5,6942.5 4580.5,6942.5 D32.1@4603,6965 ; v1(4610,7245) 4958.33,7245 K27.6@5020,7183.33
  Bottom Layer w25: v1(1375,2030) 1377.5,2027.5 1542.5,2027.5 J1.15@1545,2025 ; v1(1510,6995) 1516.76,6995 1546.76,7025 v1(2402.78,7025) 2409.54,7025 2418.04,7033.5 v1(2935,7033.5) ; v1(1715,1325) 1770,1270 4412.5,1270 v1(4415,1272.5) ; v1(1751.36,4710) 1753.86,4707.5 2367.5,4707.5 v1(2370,4705) ; v1(2625,4710) 2627.5,4707.5 2872.5,4707.5 v1(2875,4705) v1(3075,4705) ; v1(3160,7035) 4368.33,7035 K27.1@4520,6883.33 ; v1(4410,2485) 5270,2485 5401.7,2353.3 5426.7,2353.3 5620,2160 K7.5@5830,2160
A_U_FullAdder4: D37.1 D45.1 DS31.1 J1.13 K2.4 K7.3 K17.3 K17.5 K30.1 K30.6 K37.8 | length 20155.1
  Top Layer w20: K30.1@4520,7330 4585,7395 v1(4585,7705)
  Top Layer w25: DS31.1@1145,6675 1275,6805 v1(1275,7010) ; v1(1725,1200) 1720,1200 1305,1615 v1(1305,2125) v1(1305,3120) 1305,3490 1676.59,3861.59 v1(1676.59,5145) 1676.59,5376.59 2334.07,6034.07 v1(2334.07,7080) 2332.04,7082.04 2332.04,7202.96 v1(2330,7205) 2332.5,7207.5 2332.5,7747.5 v1(2335,7750) ; v1(2360,5145) 2362.5,5147.5 2632.5,5147.5 v1(2635,5150) ; v1(2874.29,5149.29) 2874.64,5148.93 2874.64,4990.36 K17.3@2875,4990 ; v1(3075,5150) K17.5@3075,5290 ; v1(4630,1200) K2.4@4630,2160 ; K7.3@5530,2360 5530,2237.29 5582.5,2184.79 5582.5,2062.5 v1(5580,2060)
  Bottom Layer w20: v1(1305,3120) K37.8@2375,3120 2382.65,3112.35 2382.65,3094.85 2447.5,3030 D45.1@2458,3030 ; K30.1@4520,7330 4575,7385 4575,7392.5 4592.5,7410 D37.1@4613,7410 ; v1(4585,7705) 4945,7705 K30.6@5020,7630
  Bottom Layer w25: v1(1275,7010) 1345,7080 v1(2334.07,7080) ; v1(1305,2125) J1.13@1545,2125 ; v1(1676.59,5145) v1(2360,5145) ; v1(1725,1200) v1(4630,1200) ; v1(2330,7205) 2391.54,7266.54 4456.54,7266.54 K30.1@4520,7330 ; v1@2635.36,5149.64 v1(2635,5150) v1(3075,5150) ; v1(4630,2055) 4632.5,2057.5 5577.5,2057.5 v1(5580,2060)
ALU_Adder_Cout: D13.1@6705,5662 J2.16 K9.8@6785,5740 K22.2 | length 1764
  Top Layer w20: K22.2@6695,5995 6785,5905 K9.8@6785,5740 6915,5740 J2.16@7780,4875
  Bottom Layer w20: D13.1@6705,5662 6705,5672.5 6764.85,5732.35 6777.35,5732.35 K9.8@6785,5740
ALU_ADDER_out0: DS39.1 K3.6 K32.2 | length 4696
  Top Layer w20: K32.2@5765,7325 5772.43,7317.57 5772.43,7267.57 6055,6985 6055,5860 DS39.1@5885,5690 5980,5595 v1(5980,4960) ; K3.6@7195,4160 7202.65,4167.65 7222.65,4167.65 7260,4205 7260,4928.28 7235,4953.28 v1(7235,4955)
  Bottom Layer w20: v1(5980,4960) 5982.5,4957.5 7232.5,4957.5 v1(7235,4955)
ALU_ADDER_out1: DS40.1 K3.3 K29.2 | length 4159.2
  Top Layer w20: v1(5740,4910) 5740,5598.33 DS40.1@5648.33,5690 5905,5946.67 5905,6740 K29.2@5765,6880 ; K3.3@6895,4160 6955,4220 v1(6955,4905)
  Bottom Layer w20: v1(5740,4910) 5742.5,4907.5 6952.5,4907.5 v1(6955,4905)
ALU_ADDER_out2: DS41.1 K4.6 K26.2 | length 3786.4
  Top Layer w20: v1(5670,4860) 5670,5431.67 DS41.1@5411.67,5690 5546.26,5824.59 5702.88,5824.59 5830,5951.72 5830,6370 K26.2@5765,6435 ; v1(6715,4855) 6820,4750 6820,4225 K4.6@6755,4160
  Bottom Layer w20: v1(5670,4860) 5672.5,4857.5 6712.5,4857.5 v1(6715,4855)
ALU_ADDER_out3: DS42.1 K4.3 K23.2 | length 3339.7
  Top Layer w20: v1(5600,4795) 5600,5265 DS42.1@5175,5690 5250,5765 5385,5765 5500,5880 5655,5880 K23.2@5765,5990 ; K4.3@6455,4160 6515,4220 v1(6515,4760)
  Bottom Layer w20: v1(5600,4795) 6472.22,4795 6507.22,4760 v1(6515,4760)
ALU_AND0: DS1.1 K15.6 K17.7 | length 2961.2
  Top Layer w25: v1(3265,5080) v1(3265,5345) ; v1(3595,5075) 3599.78,5070.22 3599.78,5053.07 3605,5047.86 3605,4835 K15.6@3670,4770 ; DS1.1@3995,3755 4045,3805 4045,3831.42 4090,3876.42 4090,4435 4035,4490 4035,4672.86 4040.22,4678.07 4040.22,4695.22 v1(4045,4700)
  Bottom Layer w25: K17.7@2675,5290 2800.75,5290 2855.75,5345 v1(3265,5345) ; v1(3265,5080) 3267.5,5077.5 3592.5,5077.5 v1(3595,5075) ; K15.6@3670,4770 3740,4700 v1(4045,4700)
ALU_AND1: DS2.1 K15.3 K18.7 | length 1813.6
  Top Layer w25: DS2.1@3285,3755 3355,3825 3355,4420 3317.5,4457.5 3317.5,4717.5 K15.3@3370,4770
  Bottom Layer w25: K18.7@2675,4860 2765,4770 K15.3@3370,4770
ALU_AND2: DS3.1 K16.6 K19.7 | length 2874
  Top Layer w25: v1(3450,4855) v1(3450,4480) 3610.36,4480 3630,4460.36 v1(3630,3765)
  Bottom Layer w25: K19.7@2675,4430 2725,4480 2745,4480 2747.5,4482.5 3144.6,4482.5 3147.1,4480 v1(3450,4480) ; v1(3450,4855) 4015,4855 K16.6@4100,4770 ; v1(3630,3765) 3634.78,3760.22 3753.12,3760.22 DS3.1@3758.33,3755
ALU_AND3: DS4.1 K16.3 K20.7 | length 2339.5
  Top Layer w25: v1(3445,4015) 3445,3831.67 DS4.1@3521.67,3755 ; K16.3@3800,4770 3870,4700 3870,4042.14 3864.78,4036.93 3864.78,4019.78 v1(3860,4015)
  Bottom Layer w25: K20.7@2675,3995 2755,3915 3150,3915 3250,4015 v1(3445,4015) v1(3860,4015)
ALU_ANDOR0: K11.6 K15.7 | length 2248.6
  Top Layer w25: K11.6@5435,4490 5505,4560 5505,4793.24 5490,4808.24 v1(5490,4815)
  Bottom Layer w25: K15.7@3670,4970 3730,4910 4020,4910 4075,4855 4685,4855 4730,4810 5104.12,4810 5109.12,4815 v1(5490,4815)
ALU_ANDOR1: K11.3 K15.2 | length 2323
  Top Layer w25: v1(5075,5050) 5075,4620 5135,4560 K11.3@5135,4490
  Bottom Layer w25: K15.2@3370,4970 3427.5,5027.5 4311.35,5027.5 4333.85,5050 v1(5075,5050)
ALU_ANDOR2: K12.6 K16.7 | length 1328.1
  Top Layer w25: v1(4585,4570) v1(4585,4970)
  Bottom Layer w25: K16.7@4100,4970 v1(4585,4970) ; v1(4585,4570) 4591.76,4570 4606.76,4555 4930,4555 K12.6@4995,4490
ALU_ANDOR3: K12.3 K16.2 | length 1336.9
  Top Layer w25: v1(4510,4500) v1(4510,4915)
  Bottom Layer w25: K16.2@3800,4970 4025.75,4970 4080.75,4915 v1(4510,4915) ; v1(4510,4500) 4514.78,4495.22 4689.78,4495.22 K12.3@4695,4490
ALU_ArithShift0: DS17.1 K5.5 K7.7 | length 2194.5
  Top Layer w25: DS17.1@5590,1800 5665,1875 5665,2395 K7.7@5830,2560
  Bottom Layer w25: K7.7@5830,2560 6115,2560 6257.5,2417.5 6897.5,2417.5 K5.5@7045,2270
ALU_ArithShift1: DS18.1 K5.4 K7.2 | length 2168.3
  Top Layer w25: DS18.1@5353.33,1800 5465,1911.67 5465,2495 K7.2@5530,2560
  Bottom Layer w25: K7.2@5530,2560 5585,2505 6045,2505 6167.5,2382.5 6632.5,2382.5 K5.4@6745,2270
ALU_ArithShift2: DS19.1 K6.5 K8.7 | length 2220.4
  Top Layer w25: DS19.1@5116.67,1800 5270,1953.33 5270,2435 K8.7@5395,2560
  Bottom Layer w25: K8.7@5395,2560 5490,2465 5985,2465 6115,2335 6555,2335 K6.5@6620,2270
ALU_ArithShift3: DS20.1 K6.4 K8.2 | length 2194.2
  Top Layer w25: DS20.1@4880,1800 5010,1930 5010,2475 K8.2@5095,2560
  Bottom Layer w25: K8.2@5095,2560 5300,2560 5440,2420 5620,2420 5770,2270 K6.4@6320,2270
ALU_ArithShiftOverflow: K1.4 K2.2 | length 2574.1
  Top Layer w25: v1(5755,2660) 5755,3700 K1.4@6015,3960
  Bottom Layer w25: K2.2@4630,2560 4730,2660 v1(5755,2660)
ALU_B0: D17.1 D42.1 D47.1 DS35.1 J1.10 K13.6 K17.1 K34.1 K37.1 | length 10225.9
  Top Layer w25: DS35.1@1150,6130 1265,6245 v1(1265,6530) ; v1(1975,2325) v1(1975,2810) 1975.68,2810.68 1975.68,5290.68 2608.89,5923.89 v1(2608.89,6530) 2608.89,7758.89 v1(2610,7760)
  Bottom Layer w20: v1(1975,2810) 1983.12,2810 1993.12,2820 K37.1@2375,2820 2375,2827.5 2447.5,2900 D47.1@2458,2900 ; v1(1975,4990) K17.1@2375,4990 2382.5,4990 2460,5067.5 D17.1@2460,5078 ; v1(2610,7320) K34.1@2940,7320 K34.1@2947.5,7320 ; D42.1@3025,7408 3025,7397.5 K34.1@2947.5,7320 ; K13.6@3815,7390 3220,7390 3150,7320 K34.1@2947.5,7320
  Bottom Layer w25: v1(1265,6530) v1(2608.89,6530) ; J1.10@1645,2325 v1(1975,2325)
ALU_B1: D18.1 D43.1 D51.1 DS36.1 J1.12 K13.3 K18.1 K35.1 K39.1 | length 10594.1
  Top Layer w20: v1(3720,7105) 3725,7100 3725,6980 v1(3730,6975) ; v1(4040,7105) 4040,7315 K13.3@4115,7390
  Top Layer w25: DS36.1@1386.67,6130 1500,6243.33 v1(1500,6480) ; v1(2050,2225) v1(2050,2390) 2050.45,2390.45 2050.45,5275.45 2677.59,5902.59 v1(2677.59,6480) 2677.59,7707.59 v1(2680,7710)
  Bottom Layer w20: v1(2050,2390) K39.1@2375,2390 2375,2392.5 2447.5,2465 D51.1@2458,2465 ; v1(2050,4560) K18.1@2375,4560 2382.65,4567.65 2400.15,4567.65 2460,4627.5 D18.1@2460,4638 ; v1(2680,6880) K35.1@2940,6880 K35.1@2947.5,6880 ; D43.1@3025,6968 3025,6957.5 K35.1@2947.5,6880 ; v1(3720,7105) v1(4040,7105) ; v1(3730,6975) 3230,6975 3135,6880 K35.1@2947.5,6880
  Bottom Layer w25: v1(1500,6480) v1(2677.59,6480) ; J1.12@1645,2225 v1(2050,2225)